# Altium PCB 175-00036, rev1, Super Sniffer.PcbDoc (part 1 of 4)
Units mil, origin at the board's own origin, x right, y up, seen from the top; angles counter-clockwise.
Board outline 6299.21 x 7874.02 mil, 5 copper layers (Top Layer (*.GTL), Mid-Layer 1 (*.G1), Internal Plane 1 (*.GP1), Mid-Layer 2  (*.G2), Bottom Layer (*.GBL)); 205 components, 359 nets, 1160 pads, 445 vias.
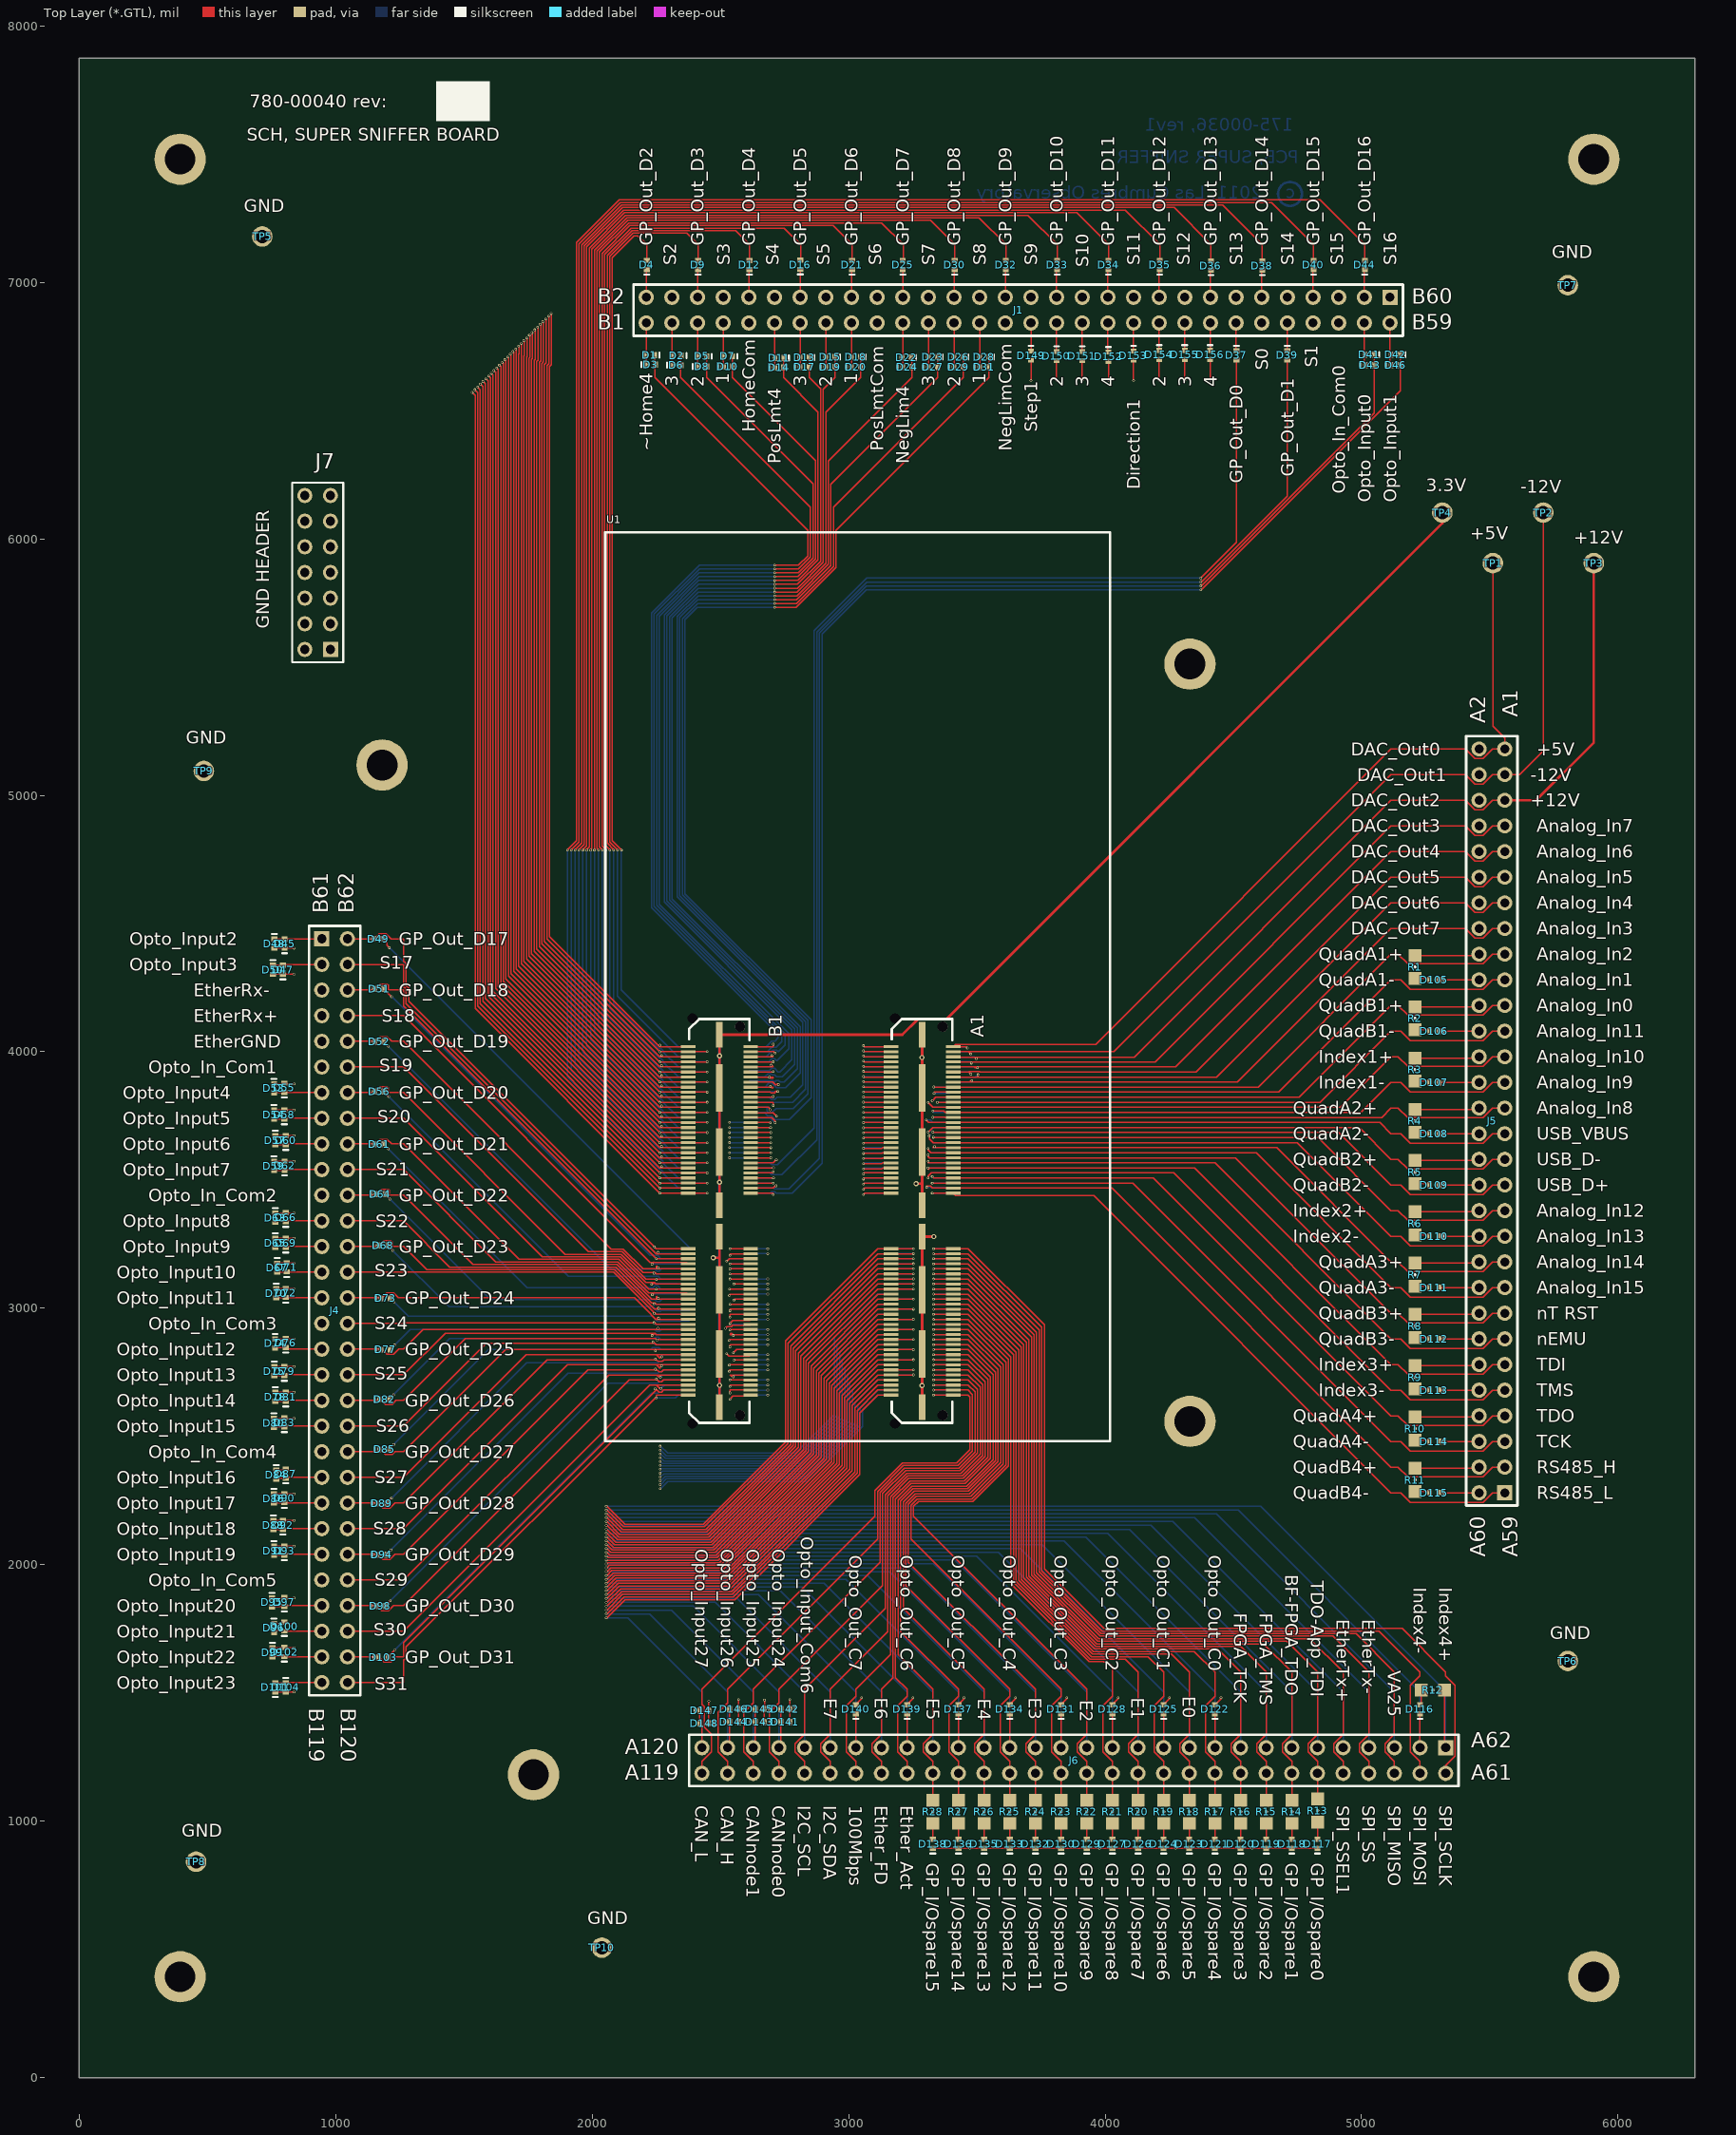
[diagram p0: Top Layer (*.GTL) view]
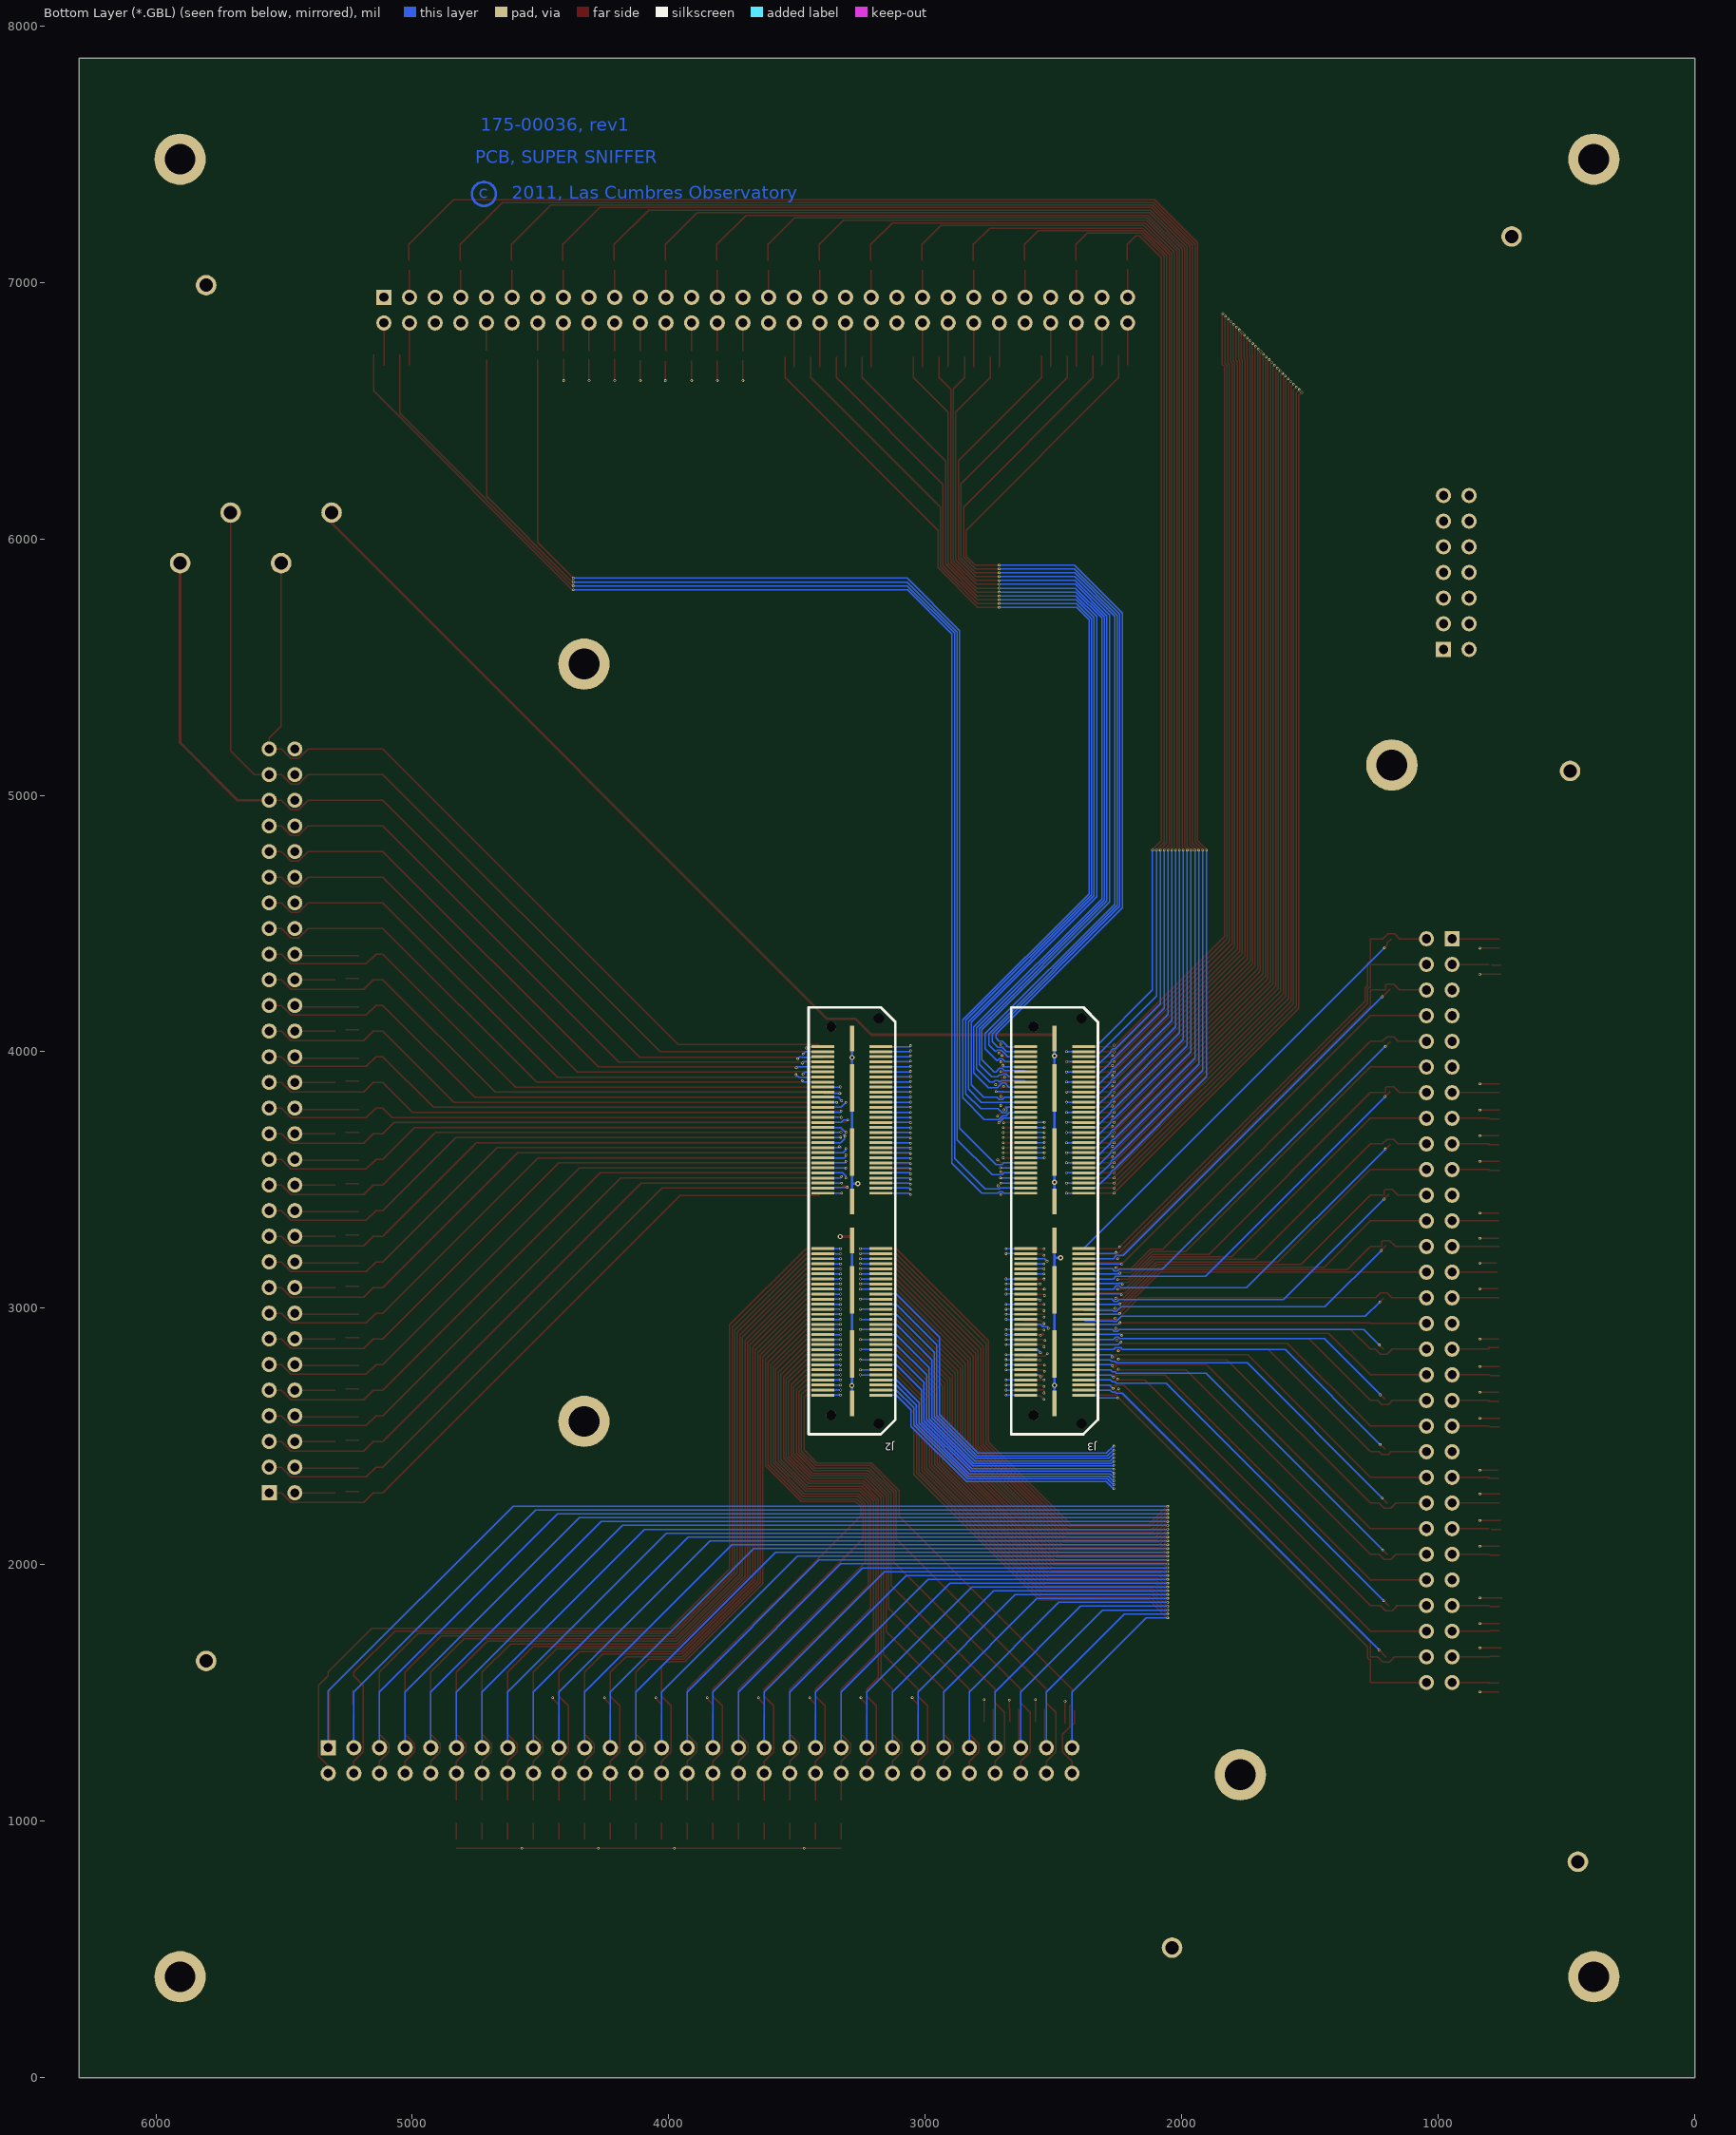
[diagram p1: Bottom Layer (*.GBL) view, seen from below]
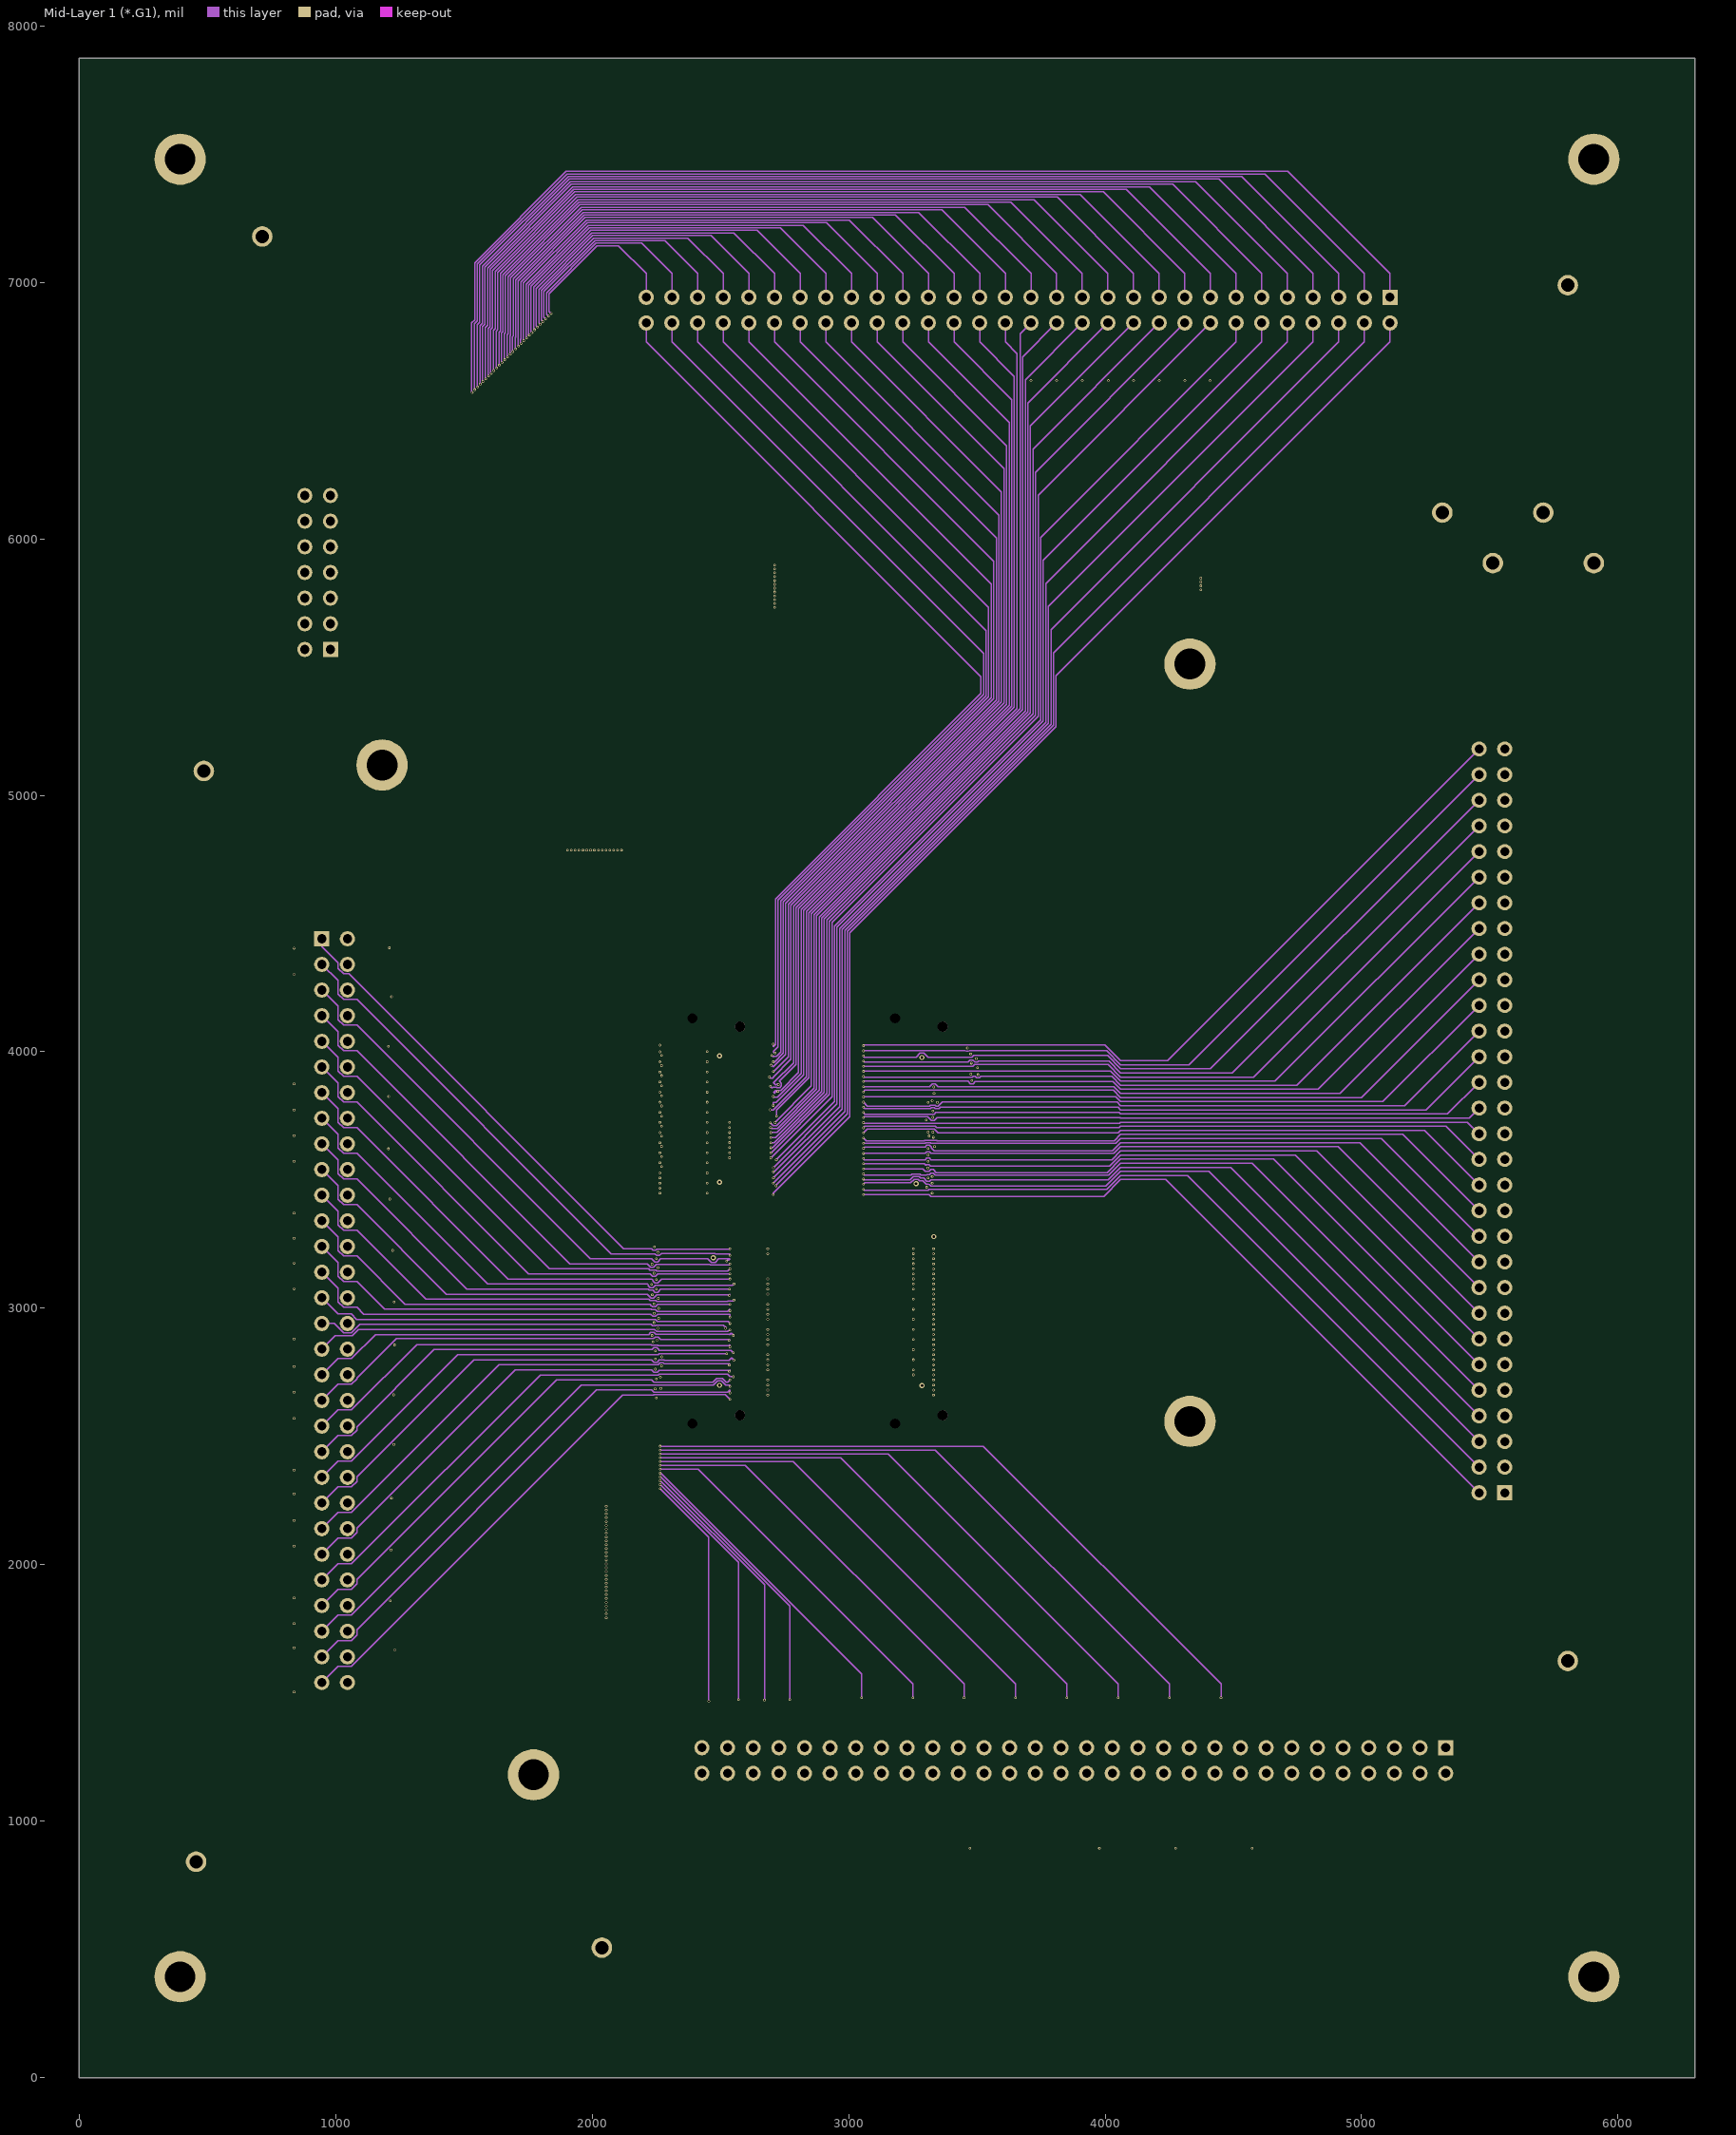
[diagram p2: Mid-Layer 1 (*.G1)]
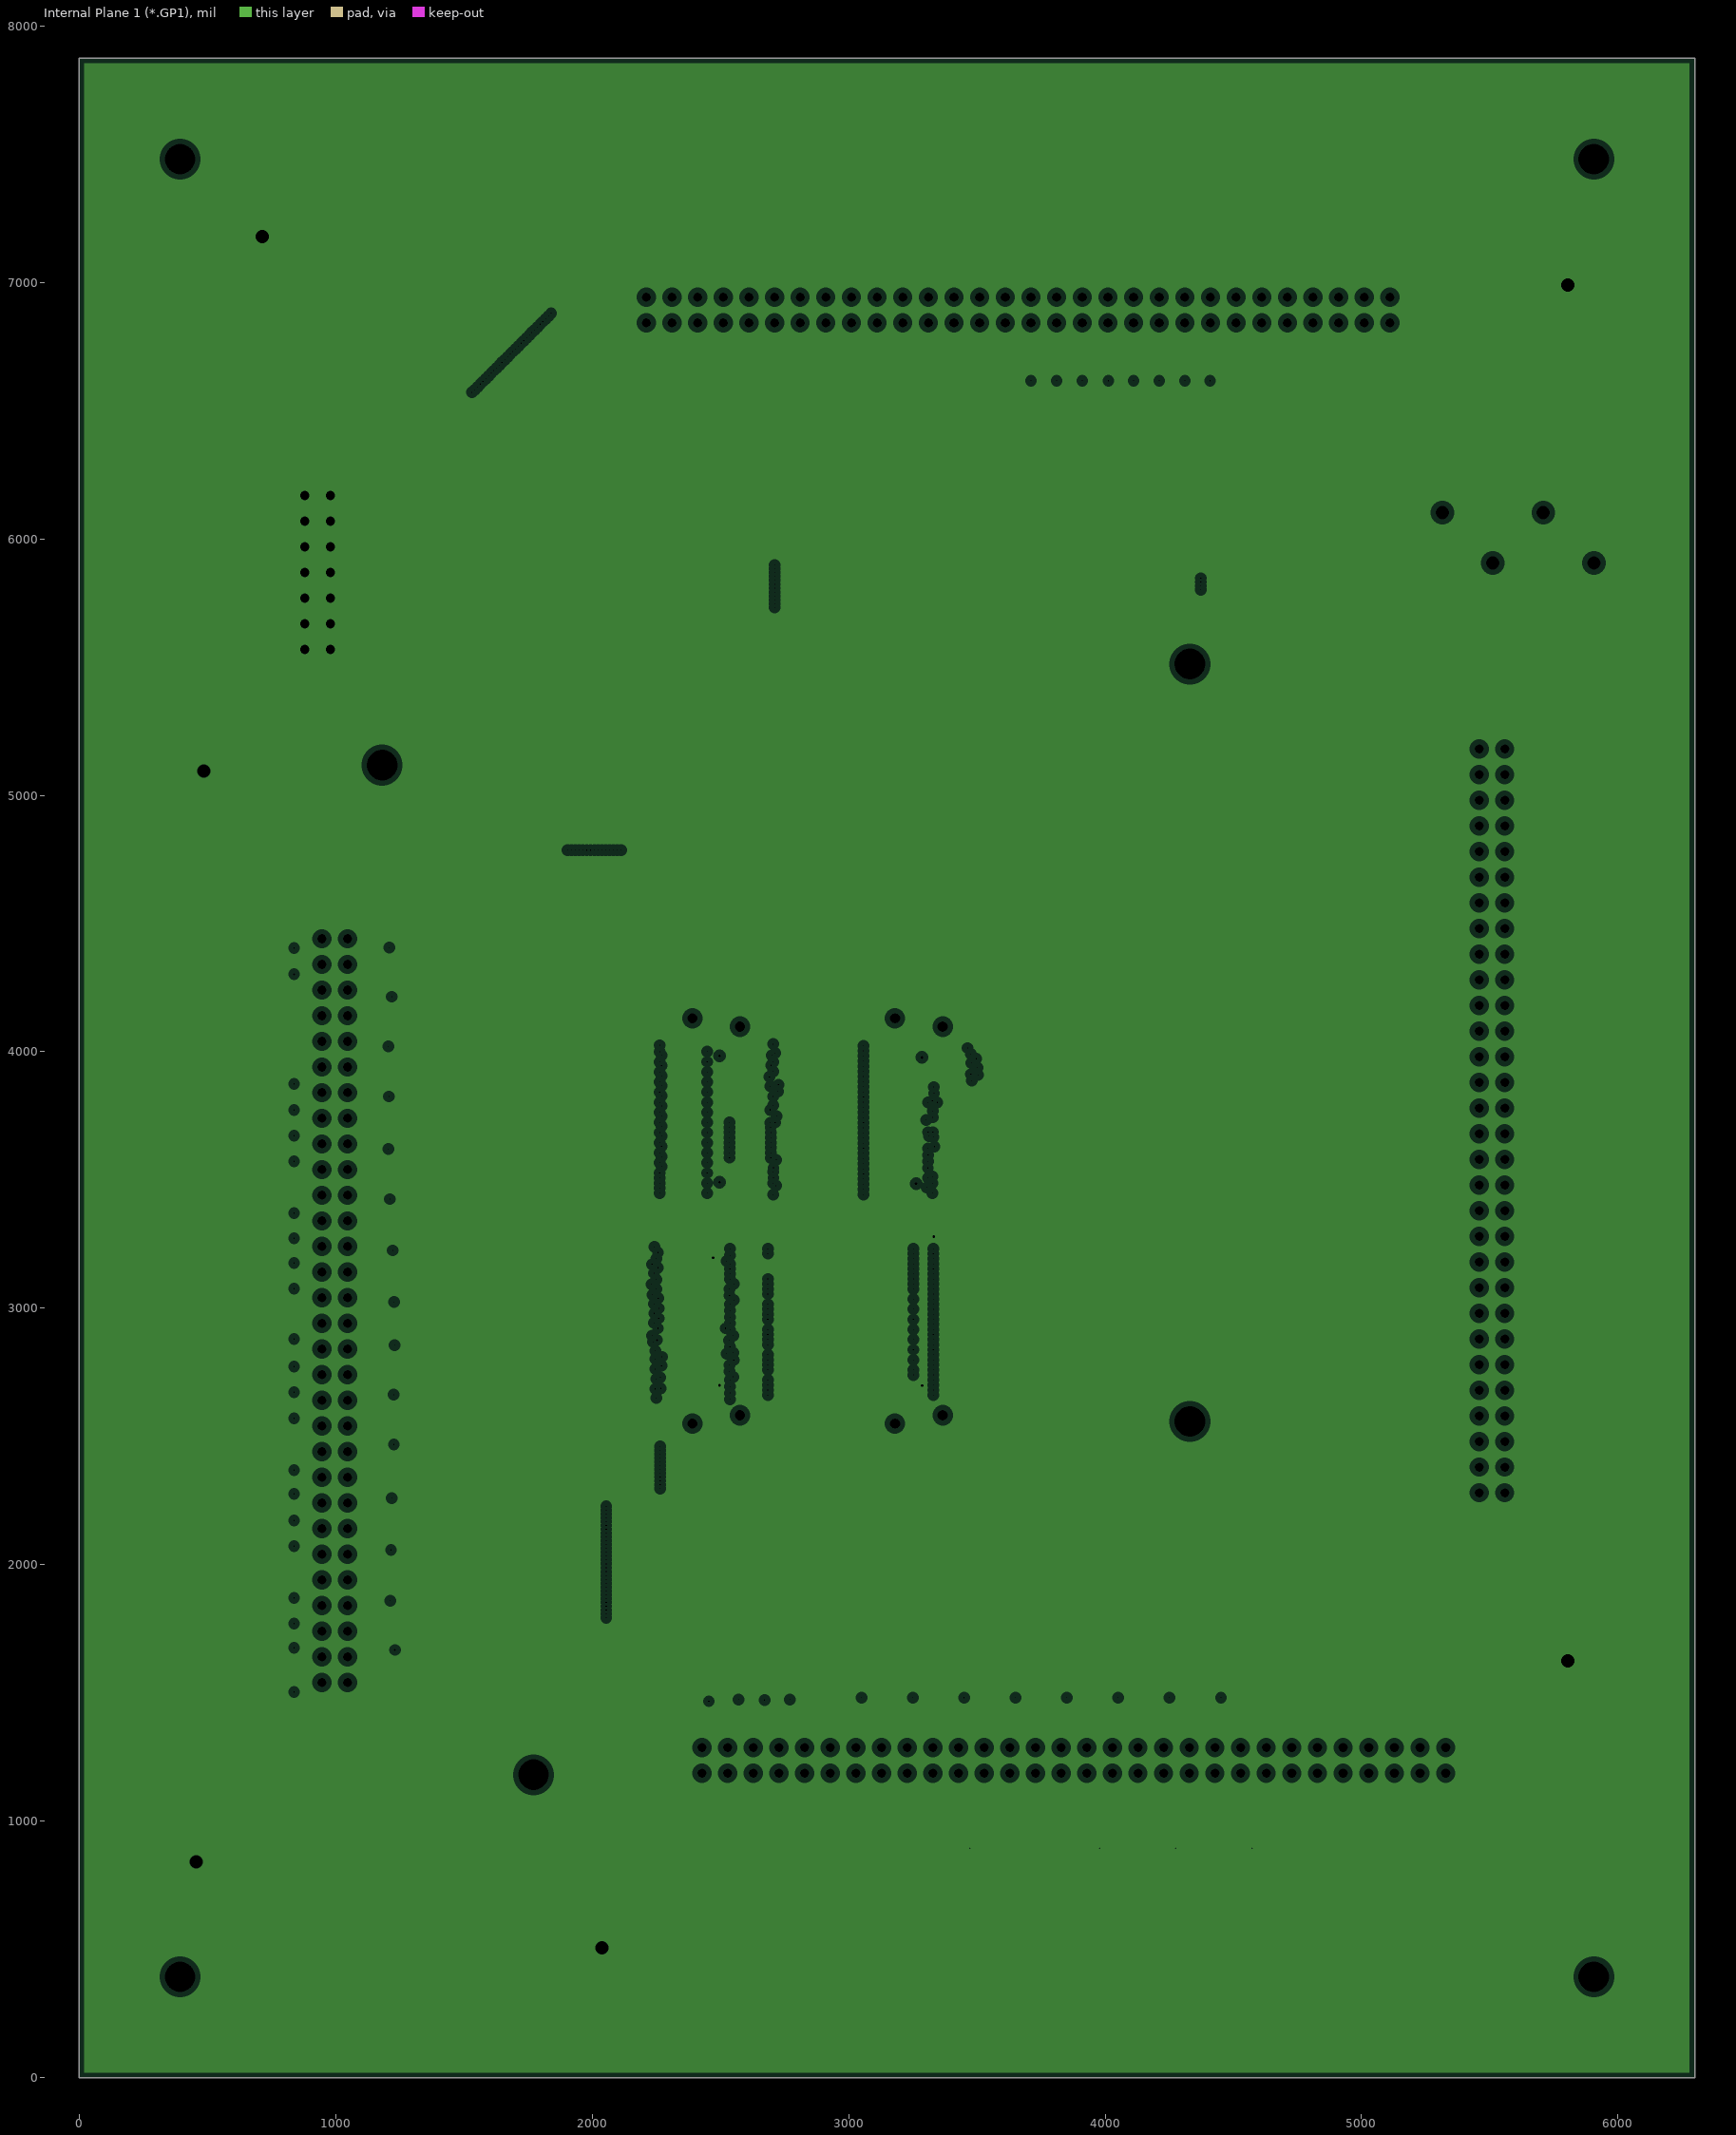
[diagram p3: Internal Plane 1 (*.GP1), clearances drawn from the general rule]
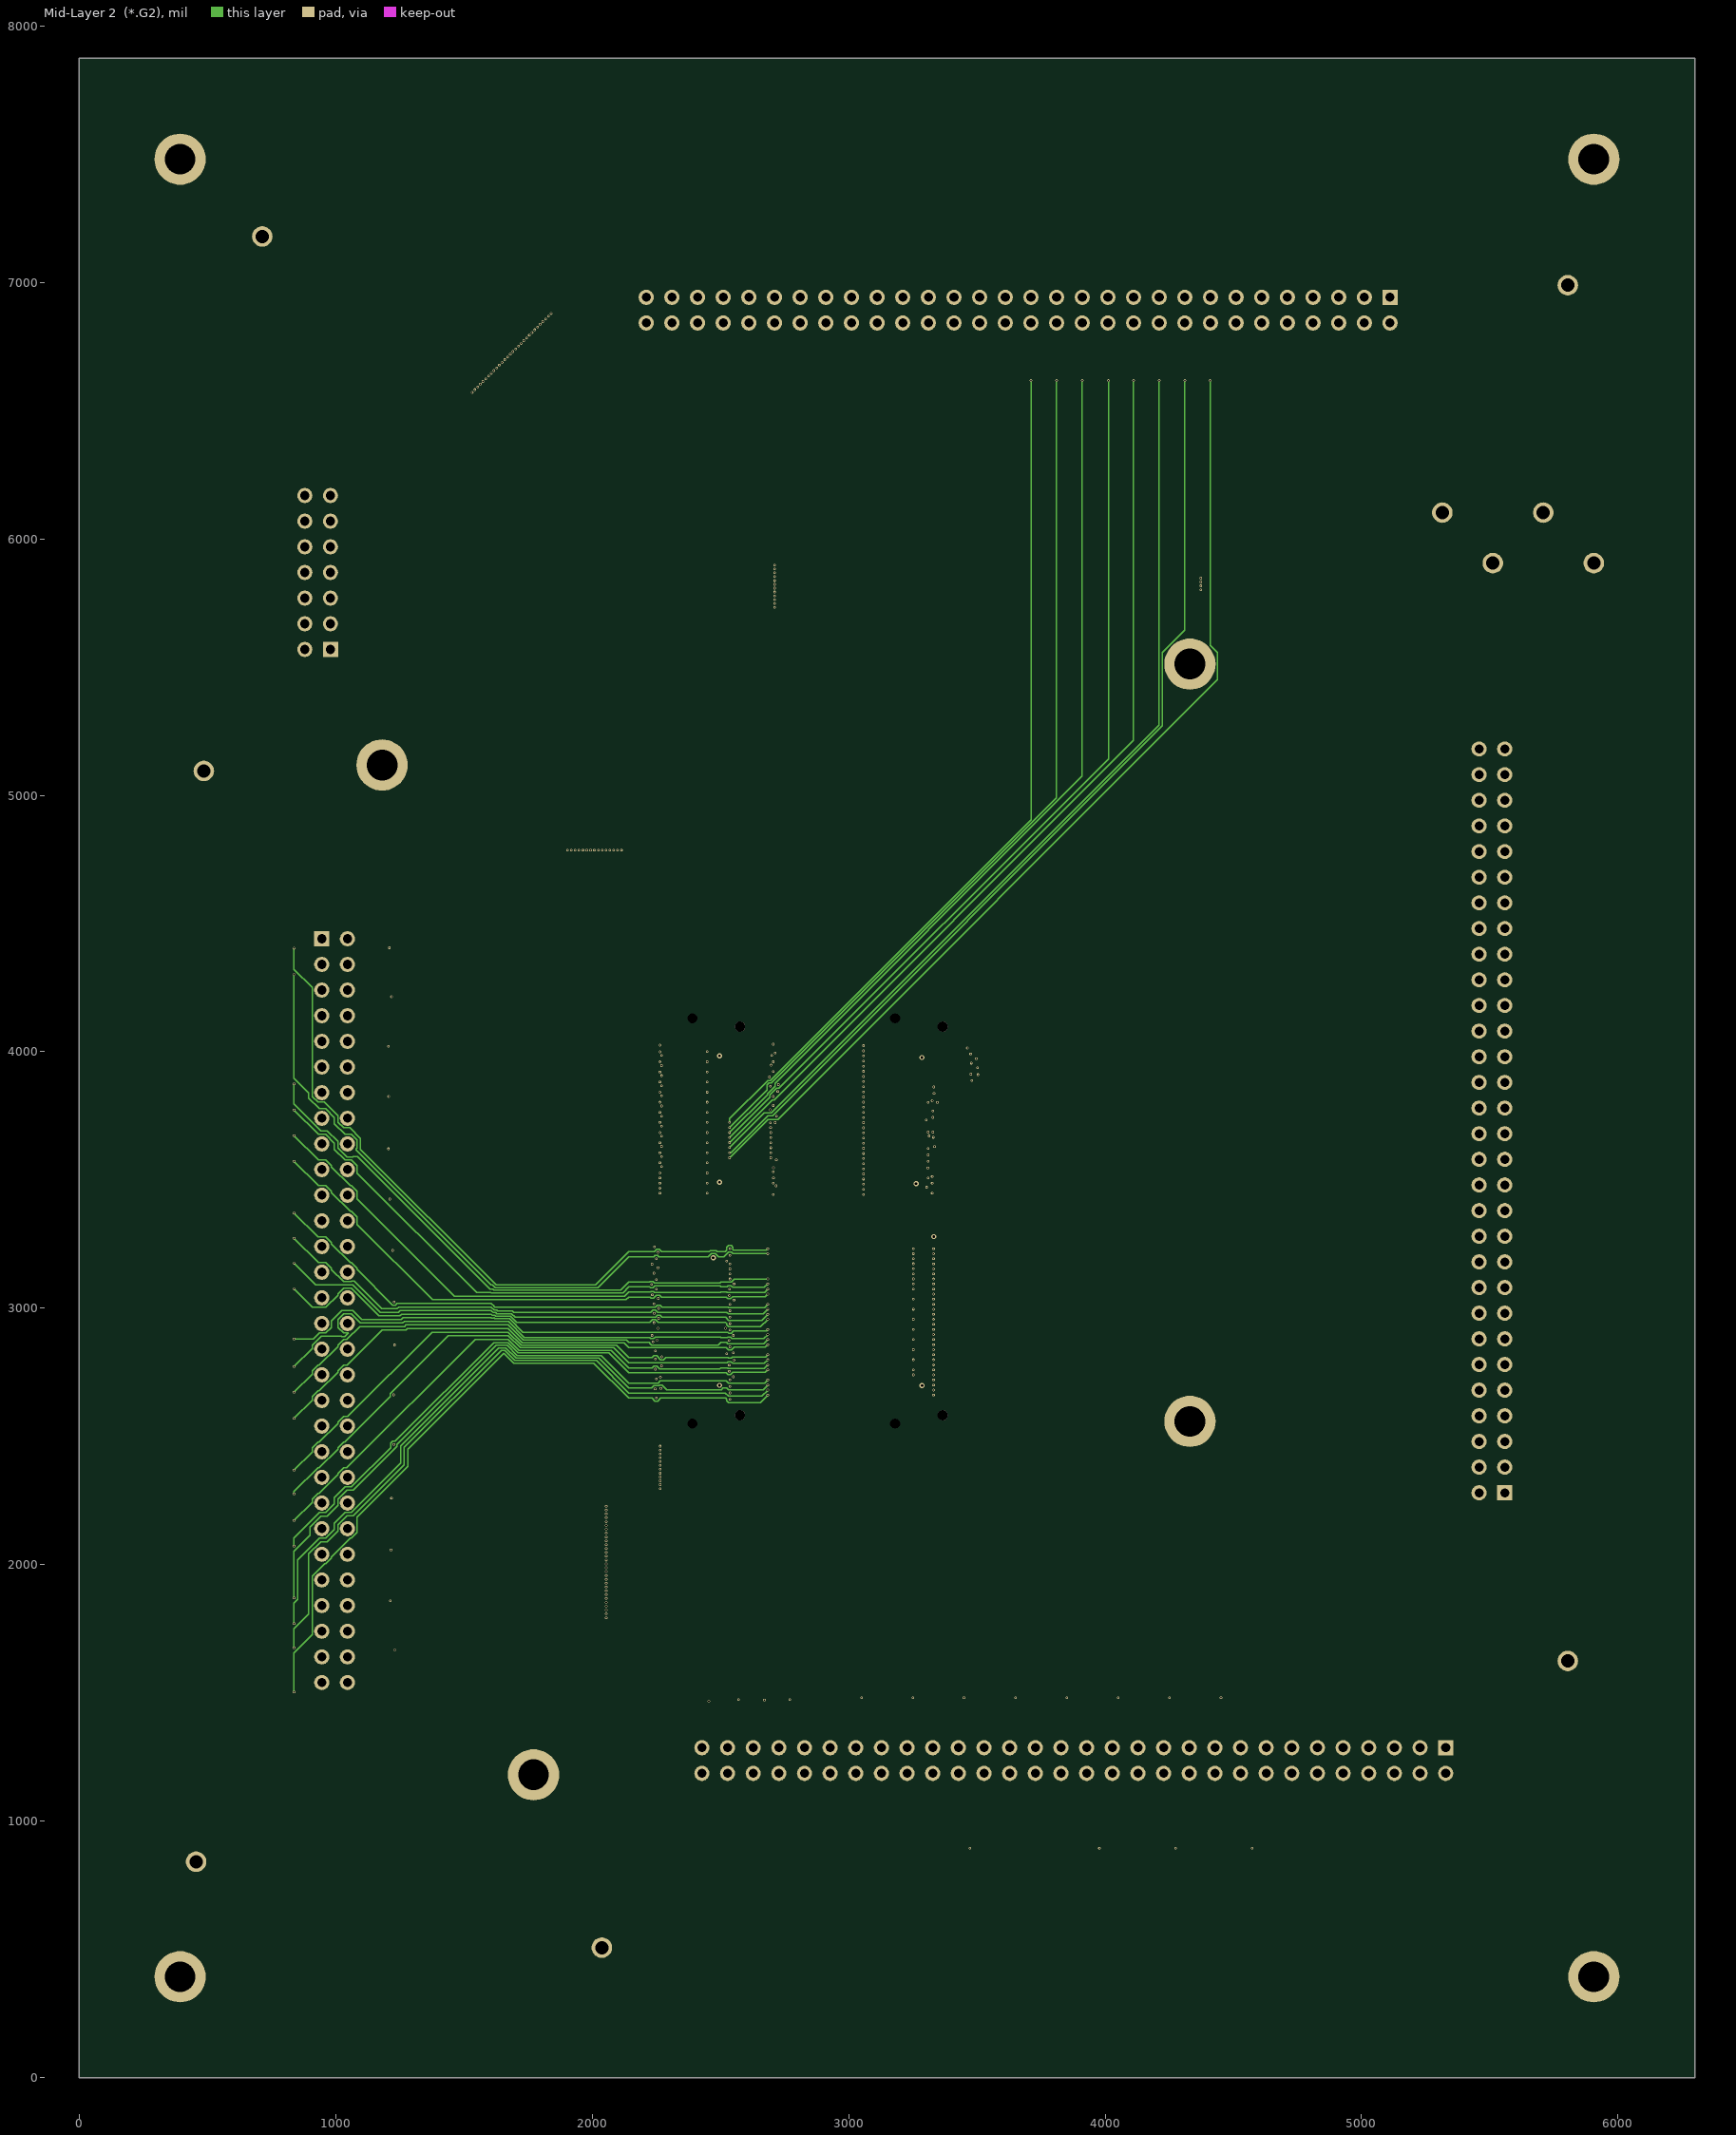
[diagram p4: Mid-Layer 2  (*.G2)]

## Layer stack, top to bottom
Top Layer (*.GTL): signal copper 1.4
Dielectric: core 12.6, FR-4, Dk 4.8
Mid-Layer 1 (*.G1): signal copper 1.4
Dielectric: prepreg 12.6, FR-4, Dk 4.8
Internal Plane 1 (*.GP1): plane copper 1.4, net GND
Dielectric: core 12.6, FR-4, Dk 4.8
Mid-Layer 2  (*.G2): signal copper 1.4
Dielectric: prepreg 12.6, FR-4, Dk 4.8
Bottom Layer (*.GBL): signal copper 1.4

## Board outline
0,0 0,7874.02 6299.21,7874.02 6299.21,0

## Design rules (kind name [scope] priority, off if disabled: settings)
Clearance [All] p1: gap=5
ComponentClearance [All] p1: gap=5 collisioncheckmode=3 verticalgap=10 showdistances=FALSE
HoleSize [All] p1: absolutevalues=TRUE maxlimit=200 minlimit=1 maxpercent=80.000 minpercent=20.000
HoleToHoleClearance [All] p1: gap=8 allowstackedmicrovias=TRUE
MinimumSolderMaskSliver [All] p1: minsoldermaskwidth=1
PlaneClearance [All] p1: clearance=20
PlaneConnect [All] p1: planeconnectstyle=Relief reliefexpansion=20 reliefentries=4 reliefconductorwidth=20 reliefairgap=8
PolygonConnect [All] p1: connectstyle=Relief reliefconductorwidth=10 reliefentries=4 polygonreliefangle="90 Angle"
RoomDefinition "780-00040, Rev1, Pg1, Super Sniffer" [InComponentClass('780-00040, Rev1, Pg1, Super Sniffer')] p1: confinementstyle=ConfineIn formatcopy=TRUE lockcomponents=FALSE outline 396.81,447.81 5956.81,447.81 5956.81,7238.81 396.81,7238.81
RoutingVias [All] p1: holewidth=4 width=10 viastyle="Through Hole" minholewidth=4 minwidth=10 maxholewidth=28 maxwidth=50
SilkToSilkClearance [All] p1: silktosilkclearance=1
SilkscreenOverComponentPads [All] p1: minsilkscreentomaskgap=1
SolderMaskExpansion [All] p1: expansion=3
Width [All] p1: maxlimit=10 minlimit=5 preferedwidth=5
20 further rules are at their usual default settings.

## Components (designator, comment, footprint, x,y, rotation, side; value= is the part's Value field where it differs from the comment)
D1 "LED SMD 0402" "LED SMD 0402" 2225.05,6715.81 r180 top
D2 "LED SMD 0402" "LED SMD 0402" 2330.05,6714.81 r180 top
D3 "LED SMD 0402" "LED SMD 0402" 2229.05,6678.81 r0 top
D4 "LED SMD 0402" "LED SMD 0402" 2213.05,7067.81 r90 top
D5 "LED SMD 0402" "LED SMD 0402" 2429.05,6711.81 r180 top
D6 "LED SMD 0402" "LED SMD 0402" 2329.05,6676.81 r0 top
D7 "LED SMD 0402" "LED SMD 0402" 2529.05,6711.81 r180 top
D8 "LED SMD 0402" "LED SMD 0402" 2429.05,6671.81 r0 top
D9 "LED SMD 0402" "LED SMD 0402" 2413.05,7067.81 r90 top
D10 "LED SMD 0402" "LED SMD 0402" 2529.05,6671.81 r0 top
D11 "LED SMD 0402" "LED SMD 0402" 2730.05,6704.81 r180 top
D12 "LED SMD 0402" "LED SMD 0402" 2613.05,7067.81 r90 top
D13 "LED SMD 0402" "LED SMD 0402" 2828.05,6706.81 r180 top
D14 "LED SMD 0402" "LED SMD 0402" 2729.05,6667.81 r0 top
D15 "LED SMD 0402" "LED SMD 0402" 2928.76,6709.81 r180 top
D16 "LED SMD 0402" "LED SMD 0402" 2812.05,7068.81 r90 top
D17 "LED SMD 0402" "LED SMD 0402" 2828.76,6669.81 r0 top
D18 "LED SMD 0402" "LED SMD 0402" 3028.76,6709.81 r180 top
D19 "LED SMD 0402" "LED SMD 0402" 2928.76,6669.81 r0 top
D20 "LED SMD 0402" "LED SMD 0402" 3028.76,6669.81 r0 top
D21 "LED SMD 0402" "LED SMD 0402" 3013.05,7067.81 r90 top
D22 "LED SMD 0402" "LED SMD 0402" 3226.05,6707.81 r180 top
D23 "LED SMD 0402" "LED SMD 0402" 3328.76,6709.81 r180 top
D24 "LED SMD 0402" "LED SMD 0402" 3228.76,6669.81 r0 top
D25 "LED SMD 0402" "LED SMD 0402" 3211.05,7067.81 r90 top
D26 "LED SMD 0402" "LED SMD 0402" 3428.76,6709.81 r180 top
D27 "LED SMD 0402" "LED SMD 0402" 3328.76,6669.81 r0 top
D28 "LED SMD 0402" "LED SMD 0402" 3528.76,6709.81 r180 top
D29 "LED SMD 0402" "LED SMD 0402" 3428.76,6669.81 r0 top
D30 "LED SMD 0402" "LED SMD 0402" 3413.05,7067.81 r90 top
D31 "LED SMD 0402" "LED SMD 0402" 3528.76,6669.81 r0 top
D32 "LED SMD 0402" "LED SMD 0402" 3613.05,7067.81 r90 top
D33 "LED SMD 0402" "LED SMD 0402" 3813.05,7067.81 r90 top
D34 "LED SMD 0402" "LED SMD 0402" 4013.05,7067.81 r90 top
D35 "LED SMD 0402" "LED SMD 0402" 4213.05,7067.81 r90 top
D36 "LED SMD 0402" "LED SMD 0402" 4413.05,7065.53 r90 top
D37 "LED SMD 0402" "LED SMD 0402" 4512.05,6715.81 r270 top
D38 "LED SMD 0402" "LED SMD 0402" 4613.05,7065.53 r90 top
D39 "LED SMD 0402" "LED SMD 0402" 4710.05,6715.81 r270 top
D40 "LED SMD 0402" "LED SMD 0402" 4813.05,7067.81 r90 top
D41 "LED SMD 0402" "LED SMD 0402" 5030.76,6717.81 r180 top
D42 "LED SMD 0402" "LED SMD 0402" 5133.05,6717.81 r180 top
D43 "LED SMD 0402" "LED SMD 0402" 5033.05,6677.81 r0 top
D44 "LED SMD 0402" "LED SMD 0402" 5013.05,7067.81 r90 top
D45 "LED SMD 0402" "LED SMD 0402" 801.05,4421.81 r90 top
D46 "LED SMD 0402" "LED SMD 0402" 5133.05,6677.81 r0 top
D47 "LED SMD 0402" "LED SMD 0402" 795.05,4319.81 r90 top
D48 "LED SMD 0402" "LED SMD 0402" 761.05,4421.81 r270 top
D49 "LED SMD 0402" "LED SMD 0402" 1166.33,4440.81 r0 top
D50 "LED SMD 0402" "LED SMD 0402" 755.05,4319.81 r270 top
D51 "LED SMD 0402" "LED SMD 0402" 1170.05,4244.81 r0 top
D52 "LED SMD 0402" "LED SMD 0402" 1170.05,4039.81 r0 top
D53 "LED SMD 0402" "LED SMD 0402" 760.05,3857.53 r270 top
D54 "LED SMD 0402" "LED SMD 0402" 760.05,3754.81 r270 top
D55 "LED SMD 0402" "LED SMD 0402" 800.05,3859.81 r90 top
D56 "LED SMD 0402" "LED SMD 0402" 1170.05,3844.81 r0 top
D57 "LED SMD 0402" "LED SMD 0402" 765.05,3654.81 r270 top
D58 "LED SMD 0402" "LED SMD 0402" 800.05,3754.81 r90 top
D59 "LED SMD 0402" "LED SMD 0402" 760.05,3554.81 r270 top
D60 "LED SMD 0402" "LED SMD 0402" 805.05,3654.81 r90 top
D61 "LED SMD 0402" "LED SMD 0402" 1170.05,3639.81 r0 top
D62 "LED SMD 0402" "LED SMD 0402" 801.05,3555.59 r90 top
D63 "LED SMD 0402" "LED SMD 0402" 765.05,3353.31 r270 top
D64 "LED SMD 0402" "LED SMD 0402" 1175.05,3444.81 r0 top
D65 "LED SMD 0402" "LED SMD 0402" 765.05,3254.81 r270 top
D66 "LED SMD 0402" "LED SMD 0402" 805.05,3354.81 r90 top
D67 "LED SMD 0402" "LED SMD 0402" 772.05,3158.31 r270 top
D68 "LED SMD 0402" "LED SMD 0402" 1185.05,3244.81 r0 top
D69 "LED SMD 0402" "LED SMD 0402" 805.05,3254.81 r90 top
D70 "LED SMD 0402" "LED SMD 0402" 768.05,3058.31 r270 top
D71 "LED SMD 0402" "LED SMD 0402" 810.05,3159.81 r90 top
D72 "LED SMD 0402" "LED SMD 0402" 805.05,3059.81 r90 top
D73 "LED SMD 0402" "LED SMD 0402" 1195.05,3039.81 r0 top
D74 "LED SMD 0402" "LED SMD 0402" 764.05,2862.81 r270 top
D75 "LED SMD 0402" "LED SMD 0402" 761.05,2754.81 r270 top
D76 "LED SMD 0402" "LED SMD 0402" 805.05,2864.81 r90 top
D77 "LED SMD 0402" "LED SMD 0402" 1195.05,2839.81 r0 top
D78 "LED SMD 0402" "LED SMD 0402" 765.05,2654.81 r270 top
D79 "LED SMD 0402" "LED SMD 0402" 800.05,2754.81 r90 top
D80 "LED SMD 0402" "LED SMD 0402" 759.05,2553.31 r270 top
D81 "LED SMD 0402" "LED SMD 0402" 805.05,2654.81 r90 top
D82 "LED SMD 0402" "LED SMD 0402" 1190.05,2644.81 r0 top
D83 "LED SMD 0402" "LED SMD 0402" 800.05,2554.81 r90 top
D84 "LED SMD 0402" "LED SMD 0402" 768.05,2350.81 r270 top
D85 "LED SMD 0402" "LED SMD 0402" 1190.05,2449.81 r0 top
D86 "LED SMD 0402" "LED SMD 0402" 759.05,2258.31 r270 top
D87 "LED SMD 0402" "LED SMD 0402" 805.05,2354.81 r90 top
D88 "LED SMD 0402" "LED SMD 0402" 757.05,2154.81 r270 top
D89 "LED SMD 0402" "LED SMD 0402" 1180.05,2239.81 r0 top
D90 "LED SMD 0402" "LED SMD 0402" 800.05,2259.81 r90 top
D91 "LED SMD 0402" "LED SMD 0402" 760.05,2054.81 r270 top
D92 "LED SMD 0402" "LED SMD 0402" 795.05,2154.81 r90 top
D93 "LED SMD 0402" "LED SMD 0402" 800.05,2054.81 r90 top
D94 "LED SMD 0402" "LED SMD 0402" 1180.05,2039.81 r0 top
D95 "LED SMD 0402" "LED SMD 0402" 752.05,1853.31 r270 top
D96 "LED SMD 0402" "LED SMD 0402" 760.05,1753.31 r270 top
D97 "LED SMD 0402" "LED SMD 0402" 800.05,1854.81 r90 top
D98 "LED SMD 0402" "LED SMD 0402" 1175.05,1839.81 r0 top
D99 "LED SMD 0402" "LED SMD 0402" 754.05,1658.31 r270 top
D100 "LED SMD 0402" "LED SMD 0402" 800.05,1759.81 r90 top
D101 "LED SMD 0402" "LED SMD 0402" 765.05,1521.81 r90 top
D102 "LED SMD 0402" "LED SMD 0402" 800.05,1659.81 r90 top
D103 "LED SMD 0402" "LED SMD 0402" 1185.05,1639.81 r0 top
D104 "LED SMD 0402" "LED SMD 0402" 805.05,1521.81 r270 top
D105 "LED SMD 0402" "LED SMD 0402" 5283.05,4280.81 r180 top
D106 "LED SMD 0402" "LED SMD 0402" 5283.05,4080.81 r180 top
D107 "LED SMD 0402" "LED SMD 0402" 5283.05,3880.81 r180 top
D108 "LED SMD 0402" "LED SMD 0402" 5283.05,3680.81 r180 top
D109 "LED SMD 0402" "LED SMD 0402" 5283.05,3480.81 r180 top
D110 "LED SMD 0402" "LED SMD 0402" 5283.05,3280.81 r180 top
D111 "LED SMD 0402" "LED SMD 0402" 5283.05,3080.81 r180 top
D112 "LED SMD 0402" "LED SMD 0402" 5283.05,2880.81 r180 top
D113 "LED SMD 0402" "LED SMD 0402" 5283.05,2680.81 r180 top
D114 "LED SMD 0402" "LED SMD 0402" 5283.05,2480.81 r180 top
D115 "LED SMD 0402" "LED SMD 0402" 5283.05,2280.81 r180 top
D116 "LED SMD 0402" "LED SMD 0402" 5228.05,1436.81 r90 top
D117 "LED SMD 0402" "LED SMD 0402" 4828.05,911.81 r90 top
D118 "LED SMD 0402" "LED SMD 0402" 4728.05,911.81 r90 top
D119 "LED SMD 0402" "LED SMD 0402" 4628.05,911.81 r90 top
D120 "LED SMD 0402" "LED SMD 0402" 4528.05,911.81 r90 top
D121 "LED SMD 0402" "LED SMD 0402" 4428.05,911.81 r90 top
D122 "LED SMD 0402" "LED SMD 0402" 4428.05,1436.81 r90 top
D123 "LED SMD 0402" "LED SMD 0402" 4328.05,911.81 r90 top
D124 "LED SMD 0402" "LED SMD 0402" 4228.05,911.81 r90 top
D125 "LED SMD 0402" "LED SMD 0402" 4228.05,1436.81 r90 top
D126 "LED SMD 0402" "LED SMD 0402" 4128.05,911.81 r90 top
D127 "LED SMD 0402" "LED SMD 0402" 4028.05,911.81 r90 top
D128 "LED SMD 0402" "LED SMD 0402" 4028.05,1436.81 r90 top
D129 "LED SMD 0402" "LED SMD 0402" 3928.05,911.81 r90 top
D130 "LED SMD 0402" "LED SMD 0402" 3828.05,911.81 r90 top
D131 "LED SMD 0402" "LED SMD 0402" 3828.05,1436.81 r90 top
D132 "LED SMD 0402" "LED SMD 0402" 3728.05,911.81 r90 top
D133 "LED SMD 0402" "LED SMD 0402" 3628.05,911.81 r90 top
D134 "LED SMD 0402" "LED SMD 0402" 3628.05,1436.81 r90 top
D135 "LED SMD 0402" "LED SMD 0402" 3528.05,911.81 r90 top
D136 "LED SMD 0402" "LED SMD 0402" 3428.05,911.81 r90 top
D137 "LED SMD 0402" "LED SMD 0402" 3428.05,1436.81 r90 top
D138 "LED SMD 0402" "LED SMD 0402" 3328.05,911.81 r90 top
D139 "LED SMD 0402" "LED SMD 0402" 3228.05,1436.81 r90 top
D140 "LED SMD 0402" "LED SMD 0402" 3028.05,1436.81 r90 top
D141 "LED SMD 0402" "LED SMD 0402" 2753.05,1386.81 r0 top
D142 "LED SMD 0402" "LED SMD 0402" 2753.05,1436.81 r180 top
D143 "LED SMD 0402" "LED SMD 0402" 2653.05,1386.81 r0 top
D144 "LED SMD 0402" "LED SMD 0402" 2553.05,1386.81 r0 top
D145 "LED SMD 0402" "LED SMD 0402" 2653.05,1436.81 r180 top
D146 "LED SMD 0402" "LED SMD 0402" 2553.05,1436.81 r180 top
D147 "LED SMD 0402" "LED SMD 0402" 2437.33,1431.81 r0 top
D148 "LED SMD 0402" "LED SMD 0402" 2437.33,1381.81 r180 top
D149 "LED SMD 0402" "LED SMD 0402" 3711.05,6714.57 r270 top
D150 "LED SMD 0402" "LED SMD 0402" 3811.05,6712.6 r270 top
D151 "LED SMD 0402" "LED SMD 0402" 3911.05,6712.6 r270 top
D152 "LED SMD 0402" "LED SMD 0402" 4013.05,6710.63 r270 top
D153 "LED SMD 0402" "LED SMD 0402" 4111.05,6714.57 r270 top
D154 "LED SMD 0402" "LED SMD 0402" 4211.05,6717.81 r270 top
D155 "LED SMD 0402" "LED SMD 0402" 4311.05,6717.81 r270 top
D156 "LED SMD 0402" "LED SMD 0402" 4409.45,6717.81 r270 top
J1 "HDR 2x30   0.1\"" "HEADER 2X30" 5111.05,6941.81 r180 top
J2 "SAMTEC QSH-060-01-X-D-A" QSH-060-010-X-D-A 3286.05,3340.81 r270 bottom locked
J3 "SAMTEC QSH-060-01-X-D-A" QSH-060-010-X-D-A 2496.05,3340.81 r270 bottom locked
J4 "HDR 2x30   0.1\"" "HEADER 2X30" 946.05,4440.81 r270 top locked
J5 "HDR 2x30   0.1\"" "HEADER 2X30" 5558.05,2280.81 r90 top
J6 "HDR 2x30   0.1\"" "HEADER 2X30" 5328.05,1286.81 r180 top
J7 "15-91-0140" HDR2X7 980,5569 r90 top
R1 "Res 0805" SMD_0805 5208.05,4330.81 r270 top
R2 "Res 0805" SMD_0805 5208.05,4130.81 r270 top
R3 "Res 0805" SMD_0805 5208.05,3930.81 r270 top
R4 "Res 0805" SMD_0805 5208.05,3730.81 r270 top
R5 "Res 0805" SMD_0805 5208.05,3530.81 r270 top
R6 "Res 0805" SMD_0805 5208.05,3330.81 r270 top
R7 "Res 0805" SMD_0805 5208.05,3130.81 r270 top
R8 "Res 0805" SMD_0805 5208.05,2930.81 r270 top
R9 "Res 0805" SMD_0805 5208.05,2730.81 r270 top
R10 "Res 0805" SMD_0805 5208.05,2530.81 r270 top
R11 "Res 0805" SMD_0805 5208.05,2330.81 r270 top
R12 "Res 0805" SMD_0805 5278.05,1511.81 r180 top
R13 "Res 0805" SMD_0805 4828.05,1041.81 r270 top
R14 "Res 0805" SMD_0805 4728.05,1036.81 r270 top
R15 "Res 0805" SMD_0805 4628.05,1036.81 r270 top
R16 "Res 0805" SMD_0805 4528.05,1036.81 r270 top
R17 "Res 0805" SMD_0805 4428.05,1036.81 r270 top
R18 "Res 0805" SMD_0805 4328.05,1036.81 r270 top
R19 "Res 0805" SMD_0805 4228.05,1036.81 r270 top
R20 "Res 0805" SMD_0805 4128.05,1036.81 r270 top
R21 "Res 0805" SMD_0805 4028.05,1036.81 r270 top
R22 "Res 0805" SMD_0805 3928.05,1036.81 r270 top
R23 "Res 0805" SMD_0805 3828.05,1036.81 r270 top
R24 "Res 0805" SMD_0805 3728.05,1036.81 r270 top
R25 "Res 0805" SMD_0805 3628.05,1036.81 r270 top
R26 "Res 0805" SMD_0805 3528.05,1036.81 r270 top
R27 "Res 0805" SMD_0805 3428.05,1036.81 r270 top
R28 "Res 0805" SMD_0805 3328.05,1036.81 r270 top
TP1 "Test point" PAD_80D_052H 5511.81,5905.51 r90 top
TP2 "Test point" PAD_80D_052H 5708.66,6102.36 r90 top
TP3 "Test point" PAD_80D_052H 5905.51,5905.51 r90 top
TP4 "Test point" PAD_80D_052H 5314.96,6102.36 r90 top
TP5 "Test point" PAD_80D_052H 714,7179 r90 top
TP6 "Test point" PAD_80D_052H 5804,1625 r90 top
TP7 "Test point" PAD_80D_052H 5804,6989 r90 top
TP8 "Test point" PAD_80D_052H 456,842 r90 top
TP9 "Test point" PAD_80D_052H 486,5095 r90 top
TP10 "Test point" PAD_80D_052H 2038,507 r90 top
U1 "SuperFin Module" "SuperFin Footprint" 3881.83,2600.52 r90 top locked
? "Comment" "TARGET MECHANICAL 5" -624,-1091 r0 top
? "Comment" "TARGET MECHANICAL 5" 7364,8065 r0 top
? "Comment" "TARGET MECHANICAL 5" -1340,8148 r0 top

## Footprints (in the part's own frame and the unit in brackets; to place one, negate y for a bottom-side part, rotate by r counter-clockwise, add the part's x,y. Pads: shape width x height; smd on the part's side, far side on the other; paste and mask are expansions set on the pad)
HDR2X7 [mm] "Connector; Header; 7x2 Position"
  rect 1.5x1.5 hole 0.9: 1(0,0)
  round 1.5 hole 0.9: 2(0,2.54) 3(2.54,0) 4(2.54,2.54) 5(5.08,0) 6(5.08,2.54) 7(7.62,0) 8(7.62,2.54) 9(10.16,0) 10(10.16,2.54) 11(12.7,0) 12(12.7,2.54) 13(15.24,0) 14(15.24,2.54)
  silkscreen extent -1.27,-1.27 16.51,3.81
"HEADER 2X30" [mm] "0.1\" SPACING"
  rect 1.5x1.5 hole 0.9: 1(0,0)
  round 1.5 hole 0.9: 2(0,2.54) 3(2.54,0) 4(2.54,2.54) 5(5.08,0) 6(5.08,2.54) 7(7.62,0) 8(7.62,2.54) 9(10.16,0) 10(10.16,2.54) 11(12.7,0) 12(12.7,2.54) 13(15.24,0) 14(15.24,2.54) 15(17.78,0) 16(17.78,2.54) 17(20.32,0) 18(20.32,2.54) 19(22.86,0) 20(22.86,2.54) 21(25.4,0) 22(25.4,2.54) 23(27.94,0) 24(27.94,2.54) 25(30.48,0) 26(30.48,2.54) 27(33.02,0) 28(33.02,2.54) 29(35.56,0) 30(35.56,2.54) 31(38.1,0) 32(38.1,2.54) 33(40.64,0) 34(40.64,2.54) 35(43.18,0) 36(43.18,2.54) 37(45.72,0) 38(45.72,2.54) 39(48.26,0) 40(48.26,2.54) 41(50.8,0) 42(50.8,2.54) 43(53.34,0) 44(53.34,2.54) 45(55.88,0) 46(55.88,2.54) 47(58.42,0) 48(58.42,2.54) 49(60.96,0) 50(60.96,2.54) 51(63.5,0) 52(63.5,2.54) 53(66.04,0) 54(66.04,2.54) 55(68.58,0) 56(68.58,2.54) 57(71.12,0) 58(71.12,2.54) 59(73.66,0) 60(73.66,2.54)
  silkscreen extent -1.27,-1.27 74.93,3.81
"LED SMD 0402" [mm] "Chip Capacitor; Body 1.0 x 0.5 mm (LxW typ)"
  rect 0.5x0.6 smd: 1(-0.45,0) 2(0.45,0)
  silkscreen extent -0.95,-0.25 -0.95,0.25
PAD_80D_052H [mil]
  round 80 hole 52: 1(0,0)
QSH-060-010-X-D-A [mm] "Samtec QSH (on SF Module)"
  round 0.508 hole 1.016 unplated mask+0.508: 0(-20.066,2.667) 0(20.066,2.667)
  rect 0.28x2.27 smd mask+0.05: 1(-17.257,-2.87) 2(-17.257,2.87) 3(-16.756,-2.87) 4(-16.756,2.87) 5(-16.256,-2.87) 6(-16.256,2.87) 7(-15.756,-2.87) 8(-15.756,2.87) 9(-15.255,-2.87) 10(-15.255,2.87) 11(-14.755,-2.87) 12(-14.755,2.87) 13(-14.255,-2.87) 14(-14.255,2.87) 15(-13.754,-2.87) 16(-13.754,2.87) 17(-13.254,-2.87) 18(-13.254,2.87) 19(-12.753,-2.87) 20(-12.753,2.87) 21(-12.253,-2.87) 22(-12.253,2.87) 23(-11.753,-2.87) 24(-11.753,2.87) 25(-11.252,-2.87) 26(-11.252,2.87) 27(-10.752,-2.87) 28(-10.752,2.87) 29(-10.252,-2.87) 30(-10.252,2.87) 31(-9.751,-2.87) 32(-9.751,2.87) 33(-9.251,-2.87) 34(-9.251,2.87) 35(-8.75,-2.87) 36(-8.75,2.87) 37(-8.25,-2.87) 38(-8.25,2.87) 39(-7.75,-2.87) 40(-7.75,2.87) 41(-7.249,-2.87) 42(-7.249,2.87) 43(-6.749,-2.87) 44(-6.749,2.87) 45(-6.248,-2.87) 46(-6.248,2.87) 47(-5.748,-2.87) 48(-5.748,2.87) 49(-5.248,-2.87) 50(-5.248,2.87) 51(-4.747,-2.87) 52(-4.747,2.87) 53(-4.247,-2.87) 54(-4.247,2.87) 55(-3.747,-2.87) 56(-3.747,2.87) 57(-3.246,-2.87) 58(-3.246,2.87) 59(-2.746,-2.87) 60(-2.746,2.87) 61(2.746,-2.87) 62(2.746,2.87) 63(3.246,-2.87) 64(3.246,2.87) 65(3.746,-2.87) 66(3.746,2.87) 67(4.247,-2.87) 68(4.247,2.87) 69(4.747,-2.87) 70(4.747,2.87) 71(5.248,-2.87) 72(5.248,2.87) 73(5.748,-2.87) 74(5.748,2.87) 75(6.248,-2.87) 76(6.248,2.87) 77(6.749,-2.87) 78(6.749,2.87) 79(7.249,-2.87) 80(7.249,2.87) 81(7.749,-2.87) 82(7.749,2.87) 83(8.25,-2.87) 84(8.25,2.87) 85(8.75,-2.87) 86(8.75,2.87) 87(9.251,-2.87) 88(9.251,2.87) 89(9.751,-2.87) 90(9.751,2.87) 91(10.251,-2.87) 92(10.251,2.87) 93(10.752,-2.87) 94(10.752,2.87) 95(11.252,-2.87) 96(11.252,2.87) 97(11.753,-2.87) 98(11.753,2.87) 99(12.253,-2.87) 100(12.253,2.87) 101(12.753,-2.87) 102(12.753,2.87) 103(13.254,-2.87) 104(13.254,2.87) 105(13.754,-2.87) 106(13.754,2.87) 107(14.254,-2.87) 108(14.254,2.87) 109(14.755,-2.87) 110(14.755,2.87) 111(15.255,-2.87) 112(15.255,2.87) 113(15.756,-2.87) 114(15.756,2.87) 115(16.256,-2.87) 116(16.256,2.87) 117(16.756,-2.87) 118(16.756,2.87) 119(17.257,-2.87) 120(17.257,2.87)
  rect 2.54x0.432 smd mask+0.051: 121(-18.066,0) 121(-1.937,0) 122(1.937,0) 122(18.066,0)
  rect 4.699x0.432 smd mask+0.051: 121(-13.176,0) 121(-6.826,0) 122(13.176,0)
  rect 4.699x0.432 smd: 122(6.826,0)
  silkscreen extent -21.14,-4.3 21.13,4.3
SMD_0805 [mil]
  rect 50x50 smd: 1(-45,0) 2(45,0)
  silkscreen extent -1,-1 1,1
"SuperFin Footprint" [mm] "SAMTEC QTH-060-01-L-D-A (x2)"
  round 1 hole 1.02 unplated: 0(38.04,13.08) 0(38.04,33.15) 1(-0.44,33.15) 1(-0.44,13.08)
  rect 0.3x1.45 smd paste+0 mask+0.05: A1(36.05,12.03) A2(36.05,18.21) A3(35.55,12.03) A4(35.55,18.21) A5(35.05,12.03) A6(35.05,18.21) A7(34.55,12.03) A8(34.55,18.21) A9(34.05,12.03) A10(34.05,18.21) A11(33.55,12.03) A12(33.55,18.21) A13(33.05,12.03) A14(33.05,18.21) A15(32.55,12.03) A16(32.55,18.21) A17(32.05,12.03) A18(32.05,18.21) A19(31.55,12.03) A20(31.55,18.21) A21(31.05,12.03) A22(31.05,18.21) A23(30.55,12.03) A24(30.55,18.21) A25(30.05,12.03) A26(30.05,18.21) A27(29.55,12.03) A28(29.55,18.21) A29(29.05,12.03) A30(29.05,18.21) A31(28.55,12.03) A32(28.55,18.21) A33(28.05,12.03) A34(28.05,18.21) A35(27.55,12.03) A36(27.55,18.21) A37(27.05,12.03) A38(27.05,18.21) A39(26.55,12.03) A40(26.55,18.21) A41(26.05,12.03) A42(26.05,18.21) A43(25.55,12.03) A44(25.55,18.21) A45(25.05,12.03) A46(25.05,18.21) A47(24.55,12.03) A48(24.55,18.21) A49(24.05,12.03) A50(24.05,18.21) A51(23.55,12.03) A52(23.55,18.21) A53(23.05,12.03) A54(23.05,18.21) A55(22.55,12.03) A56(22.55,18.21) A57(22.05,12.03) A58(22.05,18.21) A59(21.55,12.03) A60(21.55,18.21) A61(16.05,12.03) A62(16.05,18.21) A63(15.55,12.03) A64(15.55,18.21) A65(15.05,12.03) A66(15.05,18.21) A67(14.55,12.03) A68(14.55,18.21) A69(14.05,12.03) A70(14.05,18.21) A71(13.55,12.03) A72(13.55,18.21) A73(13.05,12.03) A74(13.05,18.21) A75(12.55,12.03) A76(12.55,18.21) A77(12.05,12.03) A78(12.05,18.21) A79(11.55,12.03) A80(11.55,18.21) A81(11.05,12.03) A82(11.05,18.21) A83(10.55,12.03) A84(10.55,18.21) A85(10.05,12.03) A86(10.05,18.21) A87(9.55,12.03) A88(9.55,18.21) A89(9.05,12.03) A90(9.05,18.21) A91(8.55,12.03) A92(8.55,18.21) A93(8.05,12.03) A94(8.05,18.21) A95(7.55,12.03) A96(7.55,18.21) A97(7.05,12.03) A98(7.05,18.21) A99(6.55,12.03) A100(6.55,18.21) A101(6.05,12.03) A102(6.05,18.21) A103(5.55,12.03) A104(5.55,18.21) A105(5.05,12.03) A106(5.05,18.21) A107(4.55,12.03) A108(4.55,18.21) A109(4.05,12.03) A110(4.05,18.21) A111(3.55,12.03) A112(3.55,18.21) A113(3.05,12.03) A114(3.05,18.21) A115(2.55,12.03) A116(2.55,18.21) A117(2.05,12.03) A118(2.05,18.21) A119(1.55,12.03) A120(1.55,18.21) B1(36.05,32.1) B2(36.05,38.28) B3(35.55,32.1) B4(35.55,38.28) B5(35.05,32.1) B6(35.05,38.28) B7(34.55,32.1) B8(34.55,38.28) B9(34.05,32.1) B10(34.05,38.28) B11(33.55,32.1) B12(33.55,38.28) B13(33.05,32.1) B14(33.05,38.28) B15(32.55,32.1) B16(32.55,38.28) B17(32.05,32.1) B18(32.05,38.28) B19(31.55,32.1) B20(31.55,38.28) B21(31.05,32.1) B22(31.05,38.28) B23(30.55,32.1) B24(30.55,38.28) B25(30.05,32.1) B26(30.05,38.28) B27(29.55,32.1) B28(29.55,38.28) B29(29.05,32.1) B30(29.05,38.28) B31(28.55,32.1) B32(28.55,38.28) B33(28.05,32.1) B34(28.05,38.28) B35(27.55,32.1) B36(27.55,38.28) B37(27.05,32.1) B38(27.05,38.28) B39(26.55,32.1) B40(26.55,38.28) B41(26.05,32.1) B42(26.05,38.28) B43(25.55,32.1) B44(25.55,38.28) B45(25.05,32.1) B46(25.05,38.28) B47(24.55,32.1) B48(24.55,38.28) B49(24.05,32.1) B50(24.05,38.28) B51(23.55,32.1) B52(23.55,38.28) B53(23.05,32.1) B54(23.05,38.28) B55(22.55,32.1) B56(22.55,38.28) B57(22.05,32.1) B58(22.05,38.28) B59(21.55,32.1) B60(21.55,38.28) B61(16.05,32.1) B62(16.05,38.28) B63(15.55,32.1) B64(15.55,38.28) B65(15.05,32.1) B66(15.05,38.28) B67(14.55,32.1) B68(14.55,38.28) B69(14.05,32.1) B70(14.05,38.28) B71(13.55,32.1) B72(13.55,38.28) B73(13.05,32.1) B74(13.05,38.28) B75(12.55,32.1) B76(12.55,38.28) B77(12.05,32.1) B78(12.05,38.28) B79(11.55,32.1) B80(11.55,38.28) B81(11.05,32.1) B82(11.05,38.28) B83(10.55,32.1) B84(10.55,38.28) B85(10.05,32.1) B86(10.05,38.28) B87(9.55,32.1) B88(9.55,38.28) B89(9.05,32.1) B90(9.05,38.28) B91(8.55,32.1) B92(8.55,38.28) B93(8.05,32.1) B94(8.05,38.28) B95(7.55,32.1) B96(7.55,38.28) B97(7.05,32.1) B98(7.05,38.28) B99(6.55,32.1) B100(6.55,38.28) B101(6.05,32.1) B102(6.05,38.28) B103(5.55,32.1) B104(5.55,38.28) B105(5.05,32.1) B106(5.05,38.28) B107(4.55,32.1) B108(4.55,38.28) B109(4.05,32.1) B110(4.05,38.28) B111(3.55,32.1) B112(3.55,38.28) B113(3.05,32.1) B114(3.05,38.28) B115(2.55,32.1) B116(2.55,38.28) B117(2.05,32.1) B118(2.05,38.28) B119(1.55,32.1) B120(1.55,38.28)
  rect 2.54x0.64 smd: A121(20.355,15.12) A121(37.245,15.12) A122(0.355,15.12) A122(17.245,15.12) B121(20.355,35.19) B121(37.245,35.19) B122(0.355,35.19) B122(17.245,35.19)
  rect 4.7x0.64 smd: A121(25.625,15.12) A121(31.975,15.12) A122(5.625,15.12) A122(11.975,15.12) B121(25.625,35.19) B121(31.975,35.19) B122(5.625,35.19) B122(11.975,35.19)
  silkscreen extent -3,-3.5 87,46.5
"TARGET MECHANICAL 5" [mil]

## Part data
J2 J3: library part QSH-060-01-X-D-A
J7: library part "Header 7X2", "Header, 7-Pin, Dual row"
R1 R2 R3 R4 R5 R6 R7 R8 R9 R10 R11 R12 R13 R14 R15 R16 R17 R18 R19 R20 R21 R22 R23 R24 R25 R26 R27 R28: library part "Res SMD", "Resistor 0805"
TP1 TP2 TP3 TP4 TP5 TP6 TP7 TP8 TP9 TP10: "Test Point"

## Free pads (board coordinates)
  round 200 hole 120: 0(5905.51,7480.32) 1(393.7,7480.32) 2(393.7,393.7) 3(5905.51,393.7) 4(4330.71,5511.81) 5(4330.71,2559.06) 6(1181.1,5118.11) 7(1771.65,1181.1)

## Via types
v1: diameter 10, hole 6, Top Layer (*.GTL) to Bottom Layer (*.GBL), 437 vias
v2: diameter 20, hole 10, Top Layer (*.GTL) to Bottom Layer (*.GBL), 8 vias

## Nets (pads, with @x,y where several pads share a name; then routed paths per layer and width w, separated by ;. In a path a pad name is that pad's centre, name@x,y a point inside that pad or via, vN(x,y) a via of type N, cw(c..) or ccw(c..) an arc to the next point about the centre after c; other vN are vias at no path point)
3.3V: J3.121 TP4.1 U1.B121 | length 4985.9
  Top Layer (*.GTL) w10: U1.B121@2496.39,3401.9 v2(2496.39,3491.81) U1.B121@2496.39,3609.38 U1.B121@2496.39,3859.38 v2(2496.39,3983.81) U1.B121@2496.39,4066.86 3209.81,4066.86 3271.19,4128.24 3382.24,4128.24 5314.96,6060.96 TP4.1@5314.96,6102.36
  Bottom Layer (*.GBL) w10: J3.121@2496.05,3417.06 J3.121@2496.05,3609.56 J3.121@2496.05,3859.56 J3.121@2496.05,4052.06
5V: J2.1 J5.59 TP1.1 U1.A1 | length 3528.4
  Top Layer (*.GTL) w5: v1(3463.05,4014.81) 3458.05,4019.81 U1.A1@3408.2,4019.81 3417.2,4028.81 3963.05,4028.81 5115.05,5180.81 5405.68,5180.81 5442.71,5143.78 5473.38,5143.78 5510.41,5180.81 J5.59@5558.05,5180.81 5558.05,5222.95 5511.81,5269.19 TP1.1@5511.81,5905.51
  Bottom Layer (*.GBL) w5: J2.1@3399.04,4020.21 3457.64,4020.21 v1(3463.05,4014.81)
+12V: J2.5 J5.55 TP3.1 U1.A5 | length 3849.1
  Top Layer (*.GTL) w5: U1.A5@3408.2,3980.44 3409.33,3979.31 3491.55,3979.31 ; v1(3498.05,3972.81) 3491.55,3979.31 ; J5.55@5558.05,4980.81 5510.41,4980.81 5473.38,4943.78 5442.71,4943.78 5405.68,4980.81 5115.05,4980.81 4113.55,3979.31 3491.55,3979.31
  Top Layer (*.GTL) w10: J5.55@5558.05,4980.81 5680.81,4980.81 5905.51,5205.51 TP3.1@5905.51,5905.51
  Bottom Layer (*.GBL) w5: J2.5@3399.04,3980.81 3400.54,3979.31 3481.22,3979.31 3482.73,3980.81 3490.04,3980.81 v1(3498.05,3972.81)
-12V: J2.3 J5.57 TP2.1 U1.A3 | length 3838.3
  Top Layer (*.GTL) w5: U1.A3@3408.2,4000.13 3467.73,4000.13 ; v1(3476.05,3991.81) 3467.73,4000.13 ; TP2.1@5708.66,6102.36 5708.66,5173.66 5615.81,5080.81 J5.57@5558.05,5080.81 5510.41,5080.81 5473.38,5043.78 5442.71,5043.78 5405.68,5080.81 5115.05,5080.81 4034.36,4000.13 3467.73,4000.13
  Bottom Layer (*.GBL) w5: J2.3@3399.04,4000.51 3467.34,4000.51 v1(3476.05,3991.81)
AGND: J2.121 U1.A121 | length 1349.9
  Top Layer (*.GTL) w10: v2(3263.05,3485.81) 3286.55,3485.81 ; U1.A121@3286.55,3401.9 3286.55,3485.81 ; U1.A121@3286.55,4066.86 U1.A121@3286.55,3859.38 U1.A121@3286.55,3609.38 3286.55,3485.81
  Bottom Layer (*.GBL) w10: v2(3263.05,3485.81) 3285.05,3485.81 3286.05,3486.81 ; J2.121@3286.05,3417.06 3286.05,3486.81 ; v2@3286.05,3980.81 v2(3286.05,3977.81) ; J2.121@3286.05,4052.06 v2(3286.05,3977.81) ; 3286.05,3486.81 J2.121@3286.05,3609.56 J2.121@3286.05,3859.56 v2(3286.05,3977.81)
GND: D117.1 D118.1 D119.1 D120.1 D121.1 D123.1 D124.1 D126.1 D127.1 D129.1 D130.1 D132.1 D133.1 D135.1 D136.1 D138.1 J2.122 J3.122 J7.1 J7.2 J7.3 J7.4 J7.5 J7.6 J7.7 J7.8 J7.9 J7.10 J7.11 J7.12 J7.13 J7.14 TP5.1 TP6.1 TP7.1 TP8.1 TP9.1 TP10.1 U1.A122 U1.B122 | length 4194.2
  Top Layer (*.GTL) w5: D138.1@3328.05,894.09 D136.1@3428.05,894.09 v1(3473.05,894.09) D135.1@3528.05,894.09 D133.1@3628.05,894.09 D132.1@3728.05,894.09 D130.1@3828.05,894.09 D129.1@3928.05,894.09 v1(3978.05,894.09) D127.1@4028.05,894.09 D126.1@4128.05,894.09 D124.1@4228.05,894.09 v1(4275.05,894.09) D123.1@4328.05,894.09 D121.1@4428.05,894.09 D120.1@4528.05,894.09 v1(4573.05,894.09) D119.1@4628.05,894.09 D118.1@4728.05,894.09 D117.1@4828.05,894.09
  Top Layer (*.GTL) w10: v2(2472.05,3196.81) 2496.39,3196.81 ; U1.B122@2496.39,2614.5 v2(2496.39,2699.81) U1.B122@2496.39,2821.98 U1.B122@2496.39,3071.98 2496.39,3196.81 ; U1.B122@2496.39,3279.46 2496.39,3196.81 ; U1.A122@3286.55,2614.5 v2(3286.55,2698.81) U1.A122@3286.55,2821.98 U1.A122@3286.55,3071.98 U1.A122@3286.55,3279.46 v2(3332.05,3279.46)
  Bottom Layer (*.GBL) w10: v2(2472.05,3196.81) 2495.05,3196.81 2496.05,3197.81 ; J3.122@2496.05,2629.56 J3.122@2496.05,2822.06 J3.122@2496.05,3072.06 2496.05,3197.81 ; J3.122@2496.05,3264.56 2496.05,3197.81 ; J2.122@3286.05,2629.56 J2.122@3286.05,2822.06 J2.122@3286.05,3072.06 J2.122@3286.05,3264.56
NetD1_1: D1.1 D3.2 J3.1 | length 3723.1
  Top Layer (*.GTL) w5: D1.1@2246.05,6715.53 2245.76,6715.81 D3.2@2245.76,6679.81 ; D3.2@2247.05,6678.53 D3.2@2246.76,6678.81 D3.2@2245.76,6679.81 ; v1(2712.05,5897.81) 2805.12,5897.81 2841.12,5933.81 2841.12,6033.45 2245.76,6628.81 D3.2@2245.76,6679.81
  Bottom Layer (*.GBL) w5: J3.1@2609.04,4020.21 2678.77,4020.21 2700.87,4042.31 2713.55,4042.31 2725.05,4053.81 2725.05,4069.81 2232.05,4562.81 2232.05,5710.38 2419.48,5897.81 v1(2712.05,5897.81)
NetD1_2: D1.2 D3.1 J1.60 U1.B1 | length 3991.3
  Top Layer (*.GTL) w5: J1.60@2196.05,6826.81 J1.60@2211.05,6841.81 D3.1@2211.05,6677.81 ; U1.B1@2618.05,4019.81 2706.05,4019.81 v1(2706.05,4029.81)
  Mid-Layer 1 (*.G1) w5: J1.60@2211.05,6841.81 2211.05,6767.81 3516.05,5462.81 3516.05,5397.18 2715,4596.13 2715,4028.76 2706.05,4019.81 v1(2706.05,4029.81)
NetD2_1: D2.1 D6.2 J3.3 | length 3714.5
  Top Layer (*.GTL) w5: D2.1@2345.76,6714.81 2345.76,6628.81 2851.12,6123.45 2851.12,5929.67 2804.26,5882.81 v1(2712.05,5882.81)
  Bottom Layer (*.GBL) w5: J3.3@2609.04,4000.51 2683.83,4000.51 2700.62,4017.31 2716.41,4017.31 2738.98,4039.88 2738.98,4070.02 2242.05,4566.95 2242.05,5706.23 2418.63,5882.81 v1(2712.05,5882.81)
NetD2_2: D2.2 D6.1 J1.58 U1.B3 | length 3956
  Top Layer (*.GTL) w5: D6.1@2311.05,6676.81 J1.58@2311.05,6841.81 ; U1.B3@2618.05,4000.13 2707.73,4000.13 v1(2713.05,3994.81)
  Mid-Layer 1 (*.G1) w5: J1.58@2311.05,6841.81 2311.05,6767.81 3526.05,5552.81 3526.05,5393.04 2725,4591.99 2725,4019.08 2706.05,4000.13 2711.36,3994.81 v1(2713.05,3994.81)
NetD4_1: D4.1 J1.59 U1.B2 | length 3941.5
  Top Layer (*.GTL) w5: v1(1840.05,6878.81) 1841.94,6876.92 1841.94,6679.18 1834.05,6671.29 1834.05,4449.81 2264.05,4019.81 ; J1.59@2211.05,6941.81 2211.05,7048.09 D4.1@2213.05,7050.09 ; v1(2264.05,4025.81) 2264.05,4019.81 ; U1.B2@2374.74,4019.81 2264.05,4019.81
  Mid-Layer 1 (*.G1) w5: v1(1840.05,6878.81) 1832.05,6886.81 1832.05,6955.81 2019.05,7142.81 2103.05,7142.81 2211.05,7034.81 J1.59@2211.05,6941.81
NetD4_2: D4.2 J3.2 | length 3476.2
  Top Layer (*.GTL) w5: v1(2114.05,4785.81) 2114.05,4788.49 2079.05,4823.49 2079.05,7096.81 2164.05,7181.81 2179.05,7181.81 2213.05,7147.81 D4.2@2213.05,7085.53
  Bottom Layer (*.GBL) w5: v1(2114.05,4785.81) 2114.05,4241.21 2335.05,4020.21 J3.2@2383.06,4020.21
NetD5_1: D5.1 D8.2 J3.5 | length 3711.8
  Top Layer (*.GTL) w5: D5.1@2446.76,6711.81 D8.2@2446.76,6671.81 2446.76,6628.81 2861.12,6214.45 2861.12,5925.53 2803.41,5867.81 v1(2712.05,5867.81)
  Bottom Layer (*.GBL) w5: J3.5@2609.04,3980.81 2678.27,3980.81 2704.77,4007.31 2718.22,4007.31 2725.55,3999.99 2726.94,3999.99 2752.91,4025.95 2752.91,4070.24 2252.05,4571.1 2252.05,5702.09 2417.77,5867.81 v1(2712.05,5867.81)
NetD5_2: D5.2 D8.1 J1.56 U1.B5 | length 3949.1
  Top Layer (*.GTL) w5: D8.1@2411.05,6672.81 J1.56@2411.05,6841.81 ; U1.B5@2618.05,3980.44 2706.05,3980.44 2700.89,3985.6 v1(2700.89,3985.76)
  Mid-Layer 1 (*.G1) w5: J1.56@2411.05,6841.81 2411.05,6767.81 3536.05,5642.81 3536.05,5388.89 2735,4587.85 2735,3999.09 2718.22,3982.31 2707.92,3982.31 2706.05,3980.44 2700.89,3985.6 v1(2700.89,3985.76)
NetD7_1: D7.1 D10.2 J3.7 | length 3706.4
  Top Layer (*.GTL) w5: D7.1@2546.76,6711.81 D10.2@2546.76,6671.81 2546.76,6628.81 2871.12,6304.45 2871.12,5921.38 2802.55,5852.81 v1(2712.05,5852.81)
  Bottom Layer (*.GBL) w5: J3.7@2609.04,3961.11 2688.73,3961.11 2700.87,3973.26 2711.22,3973.26 2718.55,3965.93 2720.75,3965.93 2766.84,4012.02 2766.84,4070.45 2262.05,4575.24 2262.05,5697.95 2416.91,5852.81 v1(2712.05,5852.81)
NetD7_2: D7.2 D10.1 J1.54 U1.B7 | length 3919.5
  Top Layer (*.GTL) w5: D10.1@2511.05,6670.81 J1.54@2511.05,6841.81 ; U1.B7@2618.05,3960.76 v1(2706.05,3960.76)
  Mid-Layer 1 (*.G1) w5: J1.54@2511.05,6841.81 2511.05,6767.81 3546.05,5732.81 3546.05,5384.75 2745,4583.71 2745,3994.94 2710.81,3960.76 v1(2706.05,3960.76)
NetD9_1: D9.1 J1.55 U1.B6 | length 4229.8
  Top Layer (*.GTL) w5: v1(1818.83,6857.6) 1820.73,6855.7 1820.73,6686.25 1814.05,6679.57 1814.05,4430.44 2264.05,3980.44 ; v1(2270.89,3985.76) 2269.36,3985.76 2264.05,3980.44 ; U1.B6@2374.74,3980.44 2264.05,3980.44 ; J1.55@2411.05,6941.81 D9.1@2411.05,7048.09
  Mid-Layer 1 (*.G1) w5: v1(1818.83,6857.6) 1812.05,6864.38 1812.05,6964.1 2010.76,7162.81 2283.05,7162.81 2411.05,7034.81 J1.55@2411.05,6941.81
NetD9_2: D9.2 J3.6 | length 3740.5
  Top Layer (*.GTL) w5: v1(2099.05,4785.81) 2099.05,4788.49 2069.05,4818.49 2069.05,7100.95 2159.91,7191.81 2369.05,7191.81 2413.05,7147.81 D9.2@2413.05,7085.53
  Bottom Layer (*.GBL) w5: v1(2099.05,4785.81) 2099.05,4216.81 2335.05,3980.81 J3.6@2383.06,3980.81
NetD11_1: D11.1 D14.2 J3.11 | length 3677.6
  Top Layer (*.GTL) w5: v1(2712.05,5837.81) 2801.69,5837.81 2881.12,5917.24 2881.12,6494.17 2746.48,6628.81 2746.48,6669.81 D11.1@2746.48,6709.81
  Bottom Layer (*.GBL) w5: J3.11@2609.04,3921.71 2613.83,3926.5 2692.06,3926.5 2700.87,3935.31 2711.22,3935.31 2724.82,3921.71 2732.25,3921.71 2779.05,3968.51 2779.05,4086.52 2282.05,4583.52 2282.05,5703.81 2416.05,5837.81 v1(2712.05,5837.81)
NetD11_2: D11.2 D14.1 J1.50 U1.B11 | length 3893.7
  Top Layer (*.GTL) w5: U1.B11@2618.05,3921.39 2706.05,3921.39 v1(2706.05,3922.81) ; D14.1@2711.05,6669.81 2711.05,6709.81 J1.50@2711.05,6841.81
  Mid-Layer 1 (*.G1) w5: v1(2706.05,3922.81) 2706.05,3921.39 2765,3980.34 2765,4575.42 3566.05,5376.47 3566.05,5912.81 2711.05,6767.81 J1.50@2711.05,6841.81
NetD12_1: D12.1 J1.51 U1.B10 | length 4517.8
  Top Layer (*.GTL) w5: v1(1797.62,6836.38) 1799.51,6834.49 1799.51,6693.32 1794.05,6687.85 1794.05,4411.07 2264.05,3941.07 ; v1(2270.89,3946.39) 2269.36,3946.39 2264.05,3941.07 ; U1.B10@2374.74,3941.07 2264.05,3941.07 ; J1.51@2611.05,6941.81 D12.1@2611.05,7048.09
  Mid-Layer 1 (*.G1) w5: v1(1797.62,6836.38) 1792.05,6841.96 1792.05,6972.38 2002.48,7182.81 2463.05,7182.81 2611.05,7034.81 J1.51@2611.05,6941.81
NetD12_2: D12.2 J3.10 | length 4010.4
  Top Layer (*.GTL) w5: v1(2084.05,4785.81) 2084.05,4788.49 2059.05,4813.49 2059.05,7105.1 2155.76,7201.81 2559.05,7201.81 2613.05,7147.81 D12.2@2613.05,7085.53
  Bottom Layer (*.GBL) w5: v1(2084.05,4785.81) 2084.05,4188.13 2259.55,4012.63 2269.22,4012.63 2276.55,4005.3 2276.55,3999.91 2335.05,3941.41 J3.10@2383.06,3941.41
NetD13_1: D13.1 D17.2 J3.13 | length 3668.9
  Top Layer (*.GTL) w5: v1(2712.05,5822.81) 2800.83,5822.81 2891.12,5913.1 2891.12,6584.17 2846.48,6628.81 D17.2@2846.48,6669.81 D13.1@2846.48,6709.81
  Bottom Layer (*.GBL) w5: J3.13@2609.04,3902.01 2673.34,3902.01 2685.82,3914.5 2696.68,3914.5 2701.68,3909.5 2712.04,3909.5 2719.52,3902.01 2740.41,3902.01 2790.05,3951.65 2790.05,4089.66 2292.05,4587.66 2292.05,5699.66 2415.19,5822.81 v1(2712.05,5822.81)
NetD13_2: D13.2 D17.1 J1.48 U1.B13 | length 3920
  Top Layer (*.GTL) w5: U1.B13@2618.05,3901.7 2706.05,3901.7 2706.05,3897.81 2705.24,3897 2696,3897 v1(2691,3902) ; D17.1@2811.05,6669.81 2811.05,6709.81 J1.48@2811.05,6841.81
  Mid-Layer 1 (*.G1) w5: v1(2691,3902) 2696,3897 2705.24,3897 2706.05,3897.81 2706.05,3901.7 2775,3970.65 2775,4571.28 3576.05,5372.33 3576.05,6002.81 2811.05,6767.81 J1.48@2811.05,6841.81
NetD15_1: D15.1 D19.2 J3.15 | length 3697.6
  Top Layer (*.GTL) w5: v1(2712.05,5807.81) 2799.97,5807.81 2901.12,5908.96 2901.12,6583.45 2946.48,6628.81 D19.2@2946.48,6669.81 D15.1@2946.48,6709.81
  Bottom Layer (*.GBL) w5: J3.15@2609.04,3882.31 2615.23,3888.5 2704.32,3888.5 2710.51,3882.31 2710.87,3882.31 2716.87,3888.31 2727.37,3888.31 2733.36,3882.31 2748.57,3882.31 2800.05,3933.79 2800.05,4093.81 2302.05,4591.81 2302.05,5695.52 2414.34,5807.81 v1(2712.05,5807.81)
NetD15_2: D15.2 D19.1 J1.46 U1.B15 | length 3921.7
  Top Layer (*.GTL) w5: U1.B15@2618.05,3882.02 2706.05,3882.02 2706.05,3880.81 2715.05,3871.81 2718.05,3871.81 2722.05,3875.81 2725.86,3872 v1(2726,3872) ; D19.1@2911.05,6669.81 D15.2@2911.05,6709.81 J1.46@2911.05,6841.81
  Mid-Layer 1 (*.G1) w5: v1(2726,3872) 2725.86,3872 2722.05,3875.81 2718.05,3871.81 2715.05,3871.81 2706.05,3880.81 2708.72,3880.81 2785,3957.09 2785,4567.14 3586.05,5368.18 3586.05,6092.81 2911.05,6767.81 J1.46@2911.05,6841.81
NetD16_1: D16.1 J1.47 U1.B14 | length 4805.9
  Top Layer (*.GTL) w5: v1(1776.41,6815.17) 1778.3,6813.28 1778.3,6700.39 1774.05,6696.14 1774.05,4391.7 2264.05,3901.7 ; v1(2270.89,3907.02) 2269.36,3907.02 2264.05,3901.7 ; U1.B14@2374.74,3901.7 2264.05,3901.7 ; J1.47@2811.05,6941.81 D16.1@2811.05,7048.09
  Mid-Layer 1 (*.G1) w5: v1(1776.41,6815.17) 1772.05,6819.53 1772.05,6980.66 1994.19,7202.81 2643.05,7202.81 2811.05,7034.81 J1.47@2811.05,6941.81
NetD16_2: D16.2 J3.14 | length 4271
  Top Layer (*.GTL) w5: v1(2069.05,4785.81) 2069.05,4788.49 2049.05,4808.49 2049.05,7109.24 2151.62,7211.81 2749.05,7211.81 2813.05,7147.81 D16.2@2813.05,7085.53
  Bottom Layer (*.GBL) w5: v1(2069.05,4785.81) 2069.05,4169.92 2265.71,3973.26 2269.22,3973.26 2276.55,3965.93 2276.55,3960.51 2335.05,3902.01 J3.14@2383.06,3902.01
NetD18_1: D18.1 D20.2 J3.17 | length 3770.2
  Top Layer (*.GTL) w5: v1(2712.05,5792.81) 2799.12,5792.81 2911.12,5904.82 2911.12,6493.45 3046.48,6628.81 D20.2@3046.48,6669.81 D18.1@3046.48,6709.81
  Bottom Layer (*.GBL) w5: J3.17@2609.04,3862.61 2673.94,3862.61 2689.82,3878.5 2700.18,3878.5 2707.5,3871.18 2707.5,3871.04 2719.22,3859.31 2753.43,3859.31 2811.05,3916.93 2811.05,4096.95 2312.05,4595.95 2312.05,5691.38 2413.48,5792.81 v1(2712.05,5792.81)
NetD18_2: D18.2 D20.1 J1.44 U1.B17 | length 3907.3
  Top Layer (*.GTL) w5: U1.B17@2618.05,3862.33 2706.05,3862.33 2701.56,3857.84 ; v1(2695,3866) 2702.05,3858.95 ; D20.1@3011.05,6669.81 D18.2@3011.05,6709.81 J1.44@3011.05,6841.81
  Mid-Layer 1 (*.G1) w5: v1(2695,3866) 2695,3865.86 2702.05,3858.81 2705.05,3861.81 2718.51,3861.81 2720.82,3859.5 2731.18,3859.5 2738.5,3866.82 2738.5,3877.18 2731.18,3884.5 2731.04,3884.5 2730.55,3884.99 2730.55,3886.83 2795,3951.28 2795,4562.99 3596.05,5364.04 3596.05,6182.81 3011.05,6767.81 J1.44@3011.05,6841.81
NetD21_1: D21.1 J1.43 U1.B18 | length 5094
  Top Layer (*.GTL) w5: v1(1755.19,6793.96) 1757.09,6792.06 1757.09,6707.46 1754.05,6704.42 1754.05,4372.33 2264.05,3862.33 ; v1(2270.89,3867.65) 2269.36,3867.65 2264.05,3862.33 ; U1.B18@2374.74,3862.33 2264.05,3862.33 ; J1.43@3011.05,6941.81 D21.1@3011.05,7048.09
  Mid-Layer 1 (*.G1) w5: v1(1755.19,6793.96) 1752.05,6797.11 1752.05,6988.95 1985.91,7222.81 2823.05,7222.81 3011.05,7034.81 J1.43@3011.05,6941.81
NetD21_2: D21.2 J3.18 | length 4535.3
  Top Layer (*.GTL) w5: v1(2054.05,4785.81) 2054.05,4788.49 2039.05,4803.49 2039.05,7113.38 2147.48,7221.81 2939.05,7221.81 3013.05,7147.81 D21.2@3013.05,7085.53
  Bottom Layer (*.GBL) w5: v1(2054.05,4785.81) 2054.05,4145.55 2265.71,3933.89 2269.22,3933.89 2276.55,3926.56 2276.55,3921.11 2335.05,3862.61 J3.18@2383.06,3862.61
NetD22_1: D22.1 D24.2 J3.21 | length 3885.8
  Top Layer (*.GTL) w5: v1(2712.05,5777.81) 2798.26,5777.81 2921.12,5900.67 2921.12,6303.45 3246.48,6628.81 D24.2@3246.48,6669.81 D22.1@3246.48,6709.81
  Bottom Layer (*.GBL) w5: J3.21@2609.04,3823.21 2691.11,3823.21 2700.82,3813.5 2711.18,3813.5 2720.89,3823.21 2773.05,3823.21 2821.05,3871.21 2821.05,4115.23 2332.05,4604.23 2332.05,5697.24 2412.62,5777.81 v1(2712.05,5777.81)
NetD22_2: D22.2 D24.1 J1.40 U1.B21 | length 3839.5
  Top Layer (*.GTL) w5: U1.B21@2618.05,3822.96 2706.05,3822.96 2706,3823.01 v1(2706,3826) ; D24.1@3211.05,6669.81 3211.05,6709.81 J1.40@3211.05,6841.81
  Mid-Layer 1 (*.G1) w5: v1(2706,3826) 2706,3823.01 2706.05,3822.96 2722.92,3822.96 2815,3915.04 2815,4554.71 3616.05,5355.76 3616.05,6362.81 3211.05,6767.81 J1.40@3211.05,6841.81
NetD23_1: D23.1 D27.2 J3.23 | length 3944.5
  Top Layer (*.GTL) w5: v1(2712.05,5762.81) 2797.4,5762.81 2931.12,5896.53 2931.12,6213.45 3346.48,6628.81 D27.2@3346.48,6669.81 D23.1@3346.48,6709.81
  Bottom Layer (*.GBL) w5: J3.23@2609.04,3803.51 2715.32,3803.5 2781.21,3803.51 2832.05,3854.35 2832.05,4118.38 2342.05,4608.38 2342.05,5693.1 2411.76,5762.81 v1(2712.05,5762.81)
NetD23_2: D23.2 D27.1 J1.38 U1.B23 | length 3841.3
  Top Layer (*.GTL) w5: U1.B23@2618.05,3803.28 2706.05,3803.28 v1(2706,3791) v1(2706,3791) ; D27.1@3311.05,6669.81 D23.2@3311.05,6709.81 J1.38@3311.05,6841.81
  Mid-Layer 1 (*.G1) w5: v1(2706,3791) v1(2706,3791) 2706.05,3803.28 2717.38,3803.28 2825,3910.9 2825,4550.57 3626.05,5351.62 3626.05,6452.81 3311.05,6767.81 J1.38@3311.05,6841.81
NetD25_1: D25.1 J1.39 U1.B22 | length 5382
  Top Layer (*.GTL) w5: v1(1733.98,6772.75) 1735.87,6770.85 1735.87,6714.53 1734.05,6712.71 1734.05,4352.96 2264.05,3822.96 ; v1(2270.89,3828.28) 2269.36,3828.28 2264.05,3822.96 ; U1.B22@2374.74,3822.96 2264.05,3822.96 ; J1.39@3211.05,6941.81 D25.1@3211.05,7048.09
  Mid-Layer 1 (*.G1) w5: v1(1733.98,6772.75) 1732.05,6774.68 1732.05,6997.23 1977.63,7242.81 3003.05,7242.81 3211.05,7034.81 J1.39@3211.05,6941.81
NetD25_2: D25.2 J3.22 | length 4799.5
  Top Layer (*.GTL) w5: v1(2039.05,4785.81) 2039.05,4788.49 2029.05,4798.49 2029.05,7117.52 2143.34,7231.81 3129.05,7231.81 3213.05,7147.81 D25.2@3213.05,7085.53
  Bottom Layer (*.GBL) w5: v1(2039.05,4785.81) 2039.05,4121.18 2265.71,3894.52 2269.22,3894.52 2276.55,3887.19 2276.55,3881.71 2335.05,3823.21 J3.22@2383.06,3823.21
NetD26_1: D26.1 D29.2 J3.25 | length 4044.7
  Top Layer (*.GTL) w5: v1(2712.05,5747.81) 2796.54,5747.81 2941.12,5892.39 2941.12,6123.45 3446.48,6628.81 D29.2@3446.48,6669.81 D26.1@3446.48,6709.81
  Bottom Layer (*.GBL) w5: J3.25@2609.04,3783.81 2686.37,3783.81 2681.55,3778.99 2681.55,3768.63 2688.87,3761.31 2699.22,3761.31 2716.41,3778.5 2784.06,3778.5 2842.05,3836.49 2842.05,4122.52 2352.05,4612.52 2352.05,5688.95 2410.91,5747.81 v1(2712.05,5747.81)
NetD26_2: D26.2 D29.1 J1.36 U1.B25 | length 3816.7
  Top Layer (*.GTL) w5: U1.B25@2618.05,3783.59 2687.27,3783.59 2697.05,3773.81 v1(2694.05,3773.81) ; D29.1@3411.05,6669.81 D26.2@3411.05,6709.81 J1.36@3411.05,6841.81
  Mid-Layer 1 (*.G1) w5: v1(2694.05,3773.81) 2706.49,3773.81 2835,3902.32 2835,4546.43 3636.05,5347.47 3636.05,6542.81 3411.05,6767.81 J1.36@3411.05,6841.81
NetD28_1: D28.1 D31.2 J3.27 | length 4100.8
  Top Layer (*.GTL) w5: v1(2712.05,5732.81) 2795.69,5732.81 2951.12,5888.25 2951.12,6033.45 3546.48,6628.81 D31.2@3546.48,6669.81 D28.1@3546.48,6709.81
  Bottom Layer (*.GBL) w5: J3.27@2609.04,3764.11 2671.92,3764.11 2684.73,3751.31 2699.01,3751.31 2713.82,3736.5 2769.92,3736.5 2854.05,3820.63 2854.05,4124.66 2362.05,4616.66 2362.05,5684.81 2410.05,5732.81 v1(2712.05,5732.81)
NetD28_2: D28.2 D31.1 J1.34 U1.B27 | length 3815.1
  Top Layer (*.GTL) w5: U1.B27@2618.05,3763.91 2620.64,3761.31 2703.45,3761.31 2706,3763.86 2706,3762 v1(2719,3749) ; D31.1@3511.05,6669.81 D28.2@3511.05,6709.81 J1.34@3511.05,6841.81
  Mid-Layer 1 (*.G1) w5: v1(2719,3749) 2719,3772.18 2845,3898.18 2845,4542.28 3646.05,5343.33 3646.05,6632.81 3511.05,6767.81 J1.34@3511.05,6841.81
NetD30_1: D30.1 J1.35 U1.B26 | length 5671.1
  Top Layer (*.GTL) w5: v1(1712.77,6751.53) 1714.66,6749.64 1714.66,6721.61 1714.05,6720.99 1714.05,4333.59 2264.05,3783.59 ; v1(2270.89,3788.91) 2269.36,3788.91 2264.05,3783.59 ; U1.B26@2374.74,3783.59 2264.05,3783.59 ; J1.35@3411.05,6941.81 D30.1@3411.05,7048.09
  Mid-Layer 1 (*.G1) w5: v1(1712.77,6751.53) 1710.87,6753.43 1710.87,6781.46 1712.05,6782.63 1712.05,7005.52 1969.34,7262.81 3183.05,7262.81 3411.05,7034.81 J1.35@3411.05,6941.81
NetD30_2: D30.2 J3.26 | length 5063.8
  Top Layer (*.GTL) w5: v1(2024.05,4785.81) 2024.05,4788.49 2019.05,4793.49 2019.05,7121.66 2139.19,7241.81 3319.05,7241.81 3413.05,7147.81 D30.2@3413.05,7085.53
  Bottom Layer (*.GBL) w5: v1(2024.05,4785.81) 2024.05,4096.81 2265.71,3855.15 2269.22,3855.15 2276.55,3847.82 2276.55,3842.31 2335.05,3783.81 J3.26@2383.06,3783.81
NetD32_1: D32.1 J1.31 U1.B30 | length 5960.7
  Top Layer (*.GTL) w5: v1(1691.55,6730.32) 1694.05,6727.83 1694.05,4314.22 2264.05,3744.22 ; v1(2270.89,3749.54) 2269.36,3749.54 2264.05,3744.22 ; U1.B30@2374.74,3744.22 2264.05,3744.22 ; J1.31@3611.05,6941.81 D32.1@3611.05,7048.09
  Mid-Layer 1 (*.G1) w5: v1(1691.55,6730.32) 1689.66,6732.21 1689.66,6788.53 1692.05,6790.91 1692.05,7013.8 1961.06,7282.81 3363.05,7282.81 3611.05,7034.81 J1.31@3611.05,6941.81
NetD32_2: D32.2 J3.30 | length 5328
  Top Layer (*.GTL) w5: v1(2009.05,4785.81) 2009.05,7125.81 2135.05,7251.81 3509.05,7251.81 3613.05,7147.81 D32.2@3613.05,7085.53
  Bottom Layer (*.GBL) w5: v1(2009.05,4785.81) 2009.05,4072.44 2265.71,3815.78 2269.22,3815.78 2276.55,3808.45 2276.55,3802.91 2335.05,3744.41 J3.30@2383.06,3744.41
NetD33_1: D33.1 J1.27 U1.B34 | length 6250.7
  Top Layer (*.GTL) w5: v1(1670.34,6709.11) 1674.05,6705.4 1674.05,4294.85 2264.05,3704.85 ; v1(2270.89,3710.17) 2269.36,3710.17 2264.05,3704.85 ; U1.B34@2374.74,3704.85 2264.05,3704.85 ; J1.27@3811.05,6941.81 D33.1@3811.05,7048.09
  Mid-Layer 1 (*.G1) w5: v1(1670.34,6709.11) 1668.45,6711 1668.45,6795.6 1672.05,6799.2 1672.05,7022.08 1952.77,7302.81 3543.05,7302.81 3811.05,7034.81 J1.27@3811.05,6941.81
NetD33_2: D33.2 J3.34 | length 5596.4
  Top Layer (*.GTL) w5: v1(1994.05,4785.81) 1994.05,4788.49 1999.05,4793.49 1999.05,7129.95 2130.91,7261.81 3699.05,7261.81 3813.05,7147.81 D33.2@3813.05,7085.53
  Bottom Layer (*.GBL) w5: v1(1994.05,4785.81) 1994.05,4048.07 2265.71,3776.41 2269.22,3776.41 2276.55,3769.08 2276.55,3763.51 2335.05,3705.01 J3.34@2383.06,3705.01
NetD34_1: D34.1 J1.23 U1.B38 | length 6540.8
  Top Layer (*.GTL) w5: v1(1649.13,6687.89) 1654.05,6682.97 1654.05,4275.48 2264.05,3665.48 ; v1(2270.89,3670.8) 2269.36,3670.8 2264.05,3665.48 ; U1.B38@2374.74,3665.48 2264.05,3665.48 ; J1.23@4011.05,6941.81 D34.1@4011.05,7048.09
  Mid-Layer 1 (*.G1) w5: v1(1649.13,6687.89) 1647.24,6689.79 1647.24,6802.67 1652.05,6807.48 1652.05,7030.37 1944.49,7322.81 3723.05,7322.81 4011.05,7034.81 J1.23@4011.05,6941.81
NetD34_2: D34.2 J3.38 | length 5864.8
  Top Layer (*.GTL) w5: v1(1979.05,4785.81) 1979.05,4788.49 1989.05,4798.49 1989.05,7134.09 2126.77,7271.81 3889.05,7271.81 4013.05,7147.81 D34.2@4013.05,7085.53
  Bottom Layer (*.GBL) w5: v1(1979.05,4785.81) 1979.05,4023.7 2265.71,3737.04 2269.22,3737.04 2276.55,3729.71 2276.55,3724.11 2335.05,3665.61 J3.38@2383.06,3665.61
NetD35_1: D35.1 J1.19 U1.B42 | length 6830.9
  Top Layer (*.GTL) w5: v1(1627.92,6666.68) 1634.05,6660.55 1634.05,4256.11 2264.05,3626.11 ; v1(2270.89,3631.43) 2269.36,3631.43 2264.05,3626.11 ; U1.B42@2374.74,3626.11 2264.05,3626.11 ; J1.19@4211.05,6941.81 D35.1@4211.05,7048.09
  Mid-Layer 1 (*.G1) w5: v1(1627.92,6666.68) 1626.02,6668.57 1626.02,6809.74 1632.05,6815.77 1632.05,7038.65 1936.21,7342.81 3903.05,7342.81 4211.05,7034.81 J1.19@4211.05,6941.81
NetD35_2: D35.2 J3.42 | length 6133.2
  Top Layer (*.GTL) w5: v1(1964.05,4785.81) 1964.05,4788.49 1979.05,4803.49 1979.05,7138.23 2122.63,7281.81 4079.05,7281.81 4213.05,7147.81 D35.2@4213.05,7085.53
  Bottom Layer (*.GBL) w5: v1(1964.05,4785.81) 1964.05,3999.33 2265.71,3697.67 2269.22,3697.67 2276.55,3690.34 2276.55,3684.71 2335.05,3626.21 J3.42@2383.06,3626.21
NetD36_1: D36.1 J1.15 U1.B46 | length 7121
  Top Layer (*.GTL) w5: v1(1606.7,6645.47) 1614.05,6638.12 1614.05,4236.74 2264.05,3586.74 ; v1(2270.89,3592.06) 2269.36,3592.06 2264.05,3586.74 ; U1.B46@2374.74,3586.74 2264.05,3586.74 ; J1.15@4411.05,6941.81 D36.1@4411.05,7048.09
  Mid-Layer 1 (*.G1) w5: v1(1606.7,6645.47) 1604.81,6647.36 1604.81,6816.81 1612.05,6824.05 1612.05,7046.94 1927.92,7362.81 4083.05,7362.81 4411.05,7034.81 J1.15@4411.05,6941.81
NetD36_2: D36.2 J3.46 | length 6401.6
  Top Layer (*.GTL) w5: v1(1949.05,4785.81) 1949.05,4788.49 1969.05,4808.49 1969.05,7142.37 2118.48,7291.81 4269.05,7291.81 4413.05,7147.81 D36.2@4413.05,7085.53
  Bottom Layer (*.GBL) w5: v1(1949.05,4785.81) 1949.05,3974.96 2265.71,3658.3 2269.22,3658.3 2276.55,3650.97 2276.55,3645.31 2335.05,3586.81 J3.46@2383.06,3586.81
NetD37_1: D37.1 J1.14 U1.B47 | length 4216.7
  Top Layer (*.GTL) w5: U1.B47@2618.05,3567.06 2706.06,3567.06 v1(2718,3579) ; D37.1@4511.05,6735.53 J1.14@4511.05,6841.81
  Mid-Layer 1 (*.G1) w5: v1(2718,3579) 2945.05,3806.06 2945.05,4489.54 3749,5293.5 3749,6005.76 4511.05,6767.81 J1.14@4511.05,6841.81
NetD37_2: D37.2 J3.47 | length 4758.3
  Top Layer (*.GTL) w5: v1(4373.05,5846.81) 4512.05,5985.81 D37.2@4512.05,6698.09
  Bottom Layer (*.GBL) w5: J3.47@2609.04,3567.11 2694.07,3567.11 2700.87,3560.31 2723.55,3560.31 2866.05,3702.81 2866.05,5641.24 3071.62,5846.81 v1(4373.05,5846.81)
NetD38_1: D38.1 J1.11 U1.B50 | length 7411.1
  Top Layer (*.GTL) w5: v1(1585.49,6624.25) 1594.05,6615.69 1594.05,4217.37 2264.05,3547.37 ; v1(2270.89,3552.68) 2269.36,3552.68 2264.05,3547.37 ; U1.B50@2374.74,3547.37 2264.05,3547.37 ; J1.11@4611.05,6941.81 D38.1@4611.05,7048.09
  Mid-Layer 1 (*.G1) w5: v1(1585.49,6624.25) 1583.6,6626.15 1583.6,6823.88 1592.05,6832.34 1592.05,7055.22 1919.64,7382.81 4263.05,7382.81 4611.05,7034.81 J1.11@4611.05,6941.81
NetD38_2: D38.2 J3.50 | length 6670
  Top Layer (*.GTL) w5: v1(1934.05,4785.81) 1934.05,4788.49 1959.05,4813.49 1959.05,7146.52 2114.34,7301.81 4459.05,7301.81 4613.05,7147.81 D38.2@4613.05,7085.53
  Bottom Layer (*.GBL) w5: v1(1934.05,4785.81) 1934.05,3950.59 2265.71,3618.93 2269.22,3618.93 2276.55,3611.6 2276.55,3605.91 2335.05,3547.41 J3.50@2383.06,3547.41
NetD39_1: D39.1 J1.10 U1.B51 | length 4349.2
  Top Layer (*.GTL) w5: U1.B51@2618.05,3527.69 2706.05,3527.69 v1(2706.05,3532.81) ; D39.1@4711.05,6735.53 J1.10@4711.05,6841.81
  Mid-Layer 1 (*.G1) w5: v1(2706.05,3532.81) 2706.05,3527.69 2965.05,3786.69 2965.05,4481.26 3769,5285.21 3769,5825.76 4711.05,6767.81 J1.10@4711.05,6841.81
NetD39_2: D39.2 J3.51 | length 4891.8
  Top Layer (*.GTL) w5: v1(4373.05,5831.81) 4375.72,5831.81 4710.05,6166.13 D39.2@4710.05,6698.09
  Bottom Layer (*.GBL) w5: J3.51@2609.04,3527.71 2693.47,3527.71 2700.87,3520.31 2739.27,3520.31 2876.05,3657.09 2876.05,5637.1 3070.76,5831.81 v1(4373.05,5831.81)